# Allegro board LAY-46368_A1.brd
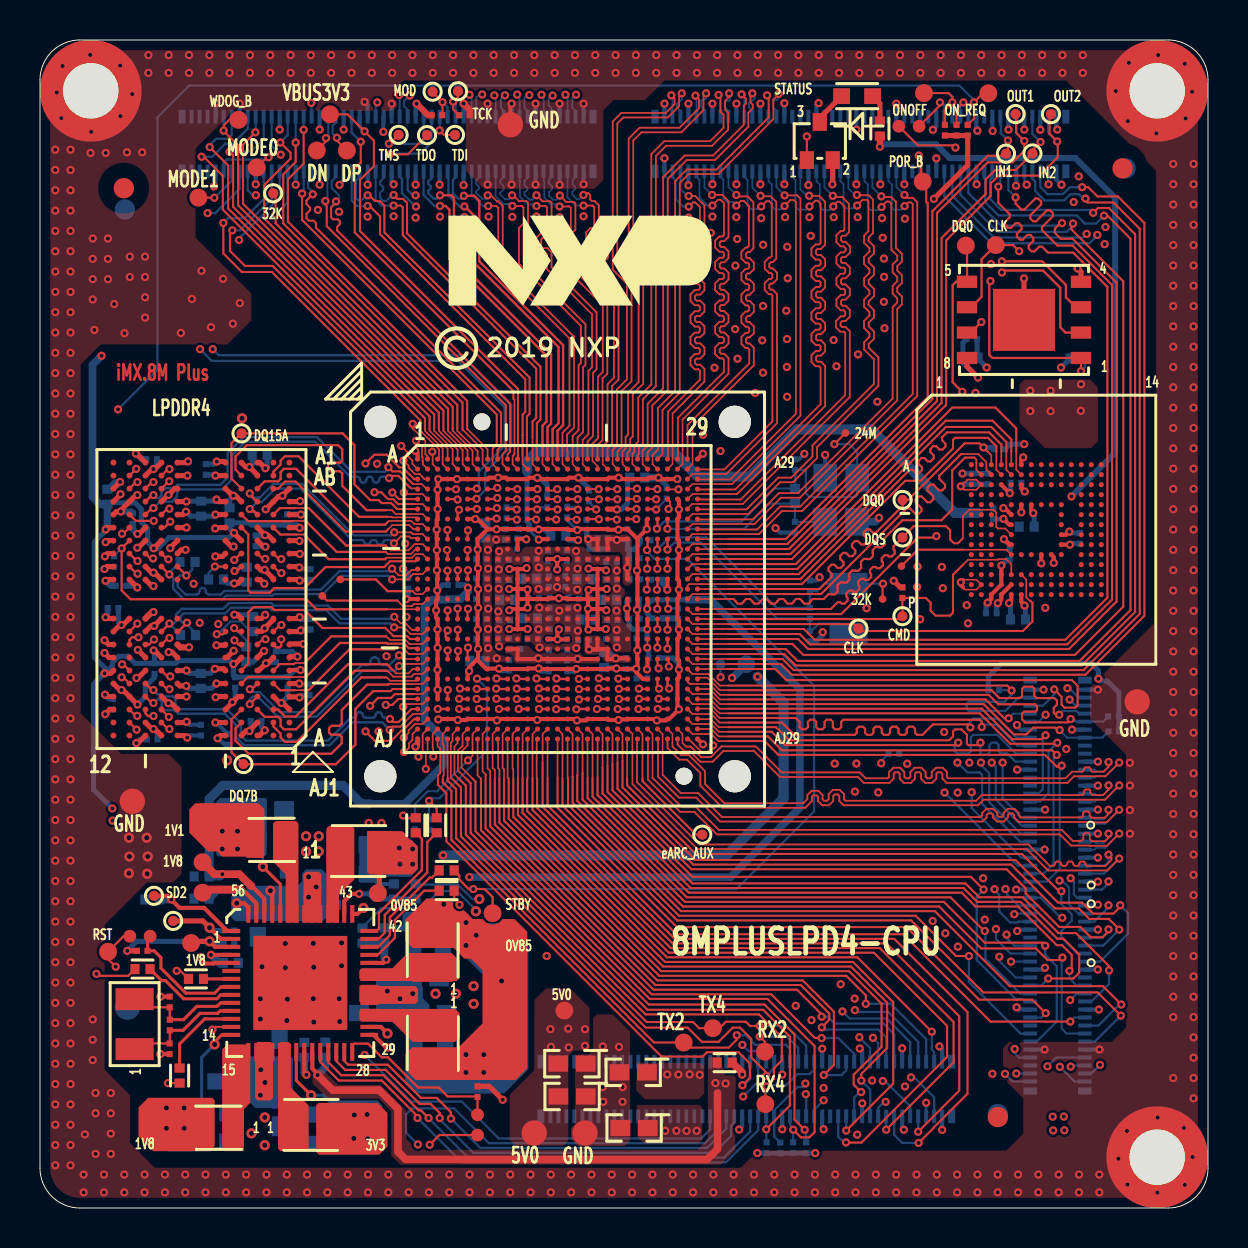
[diagram p0: board, top side]
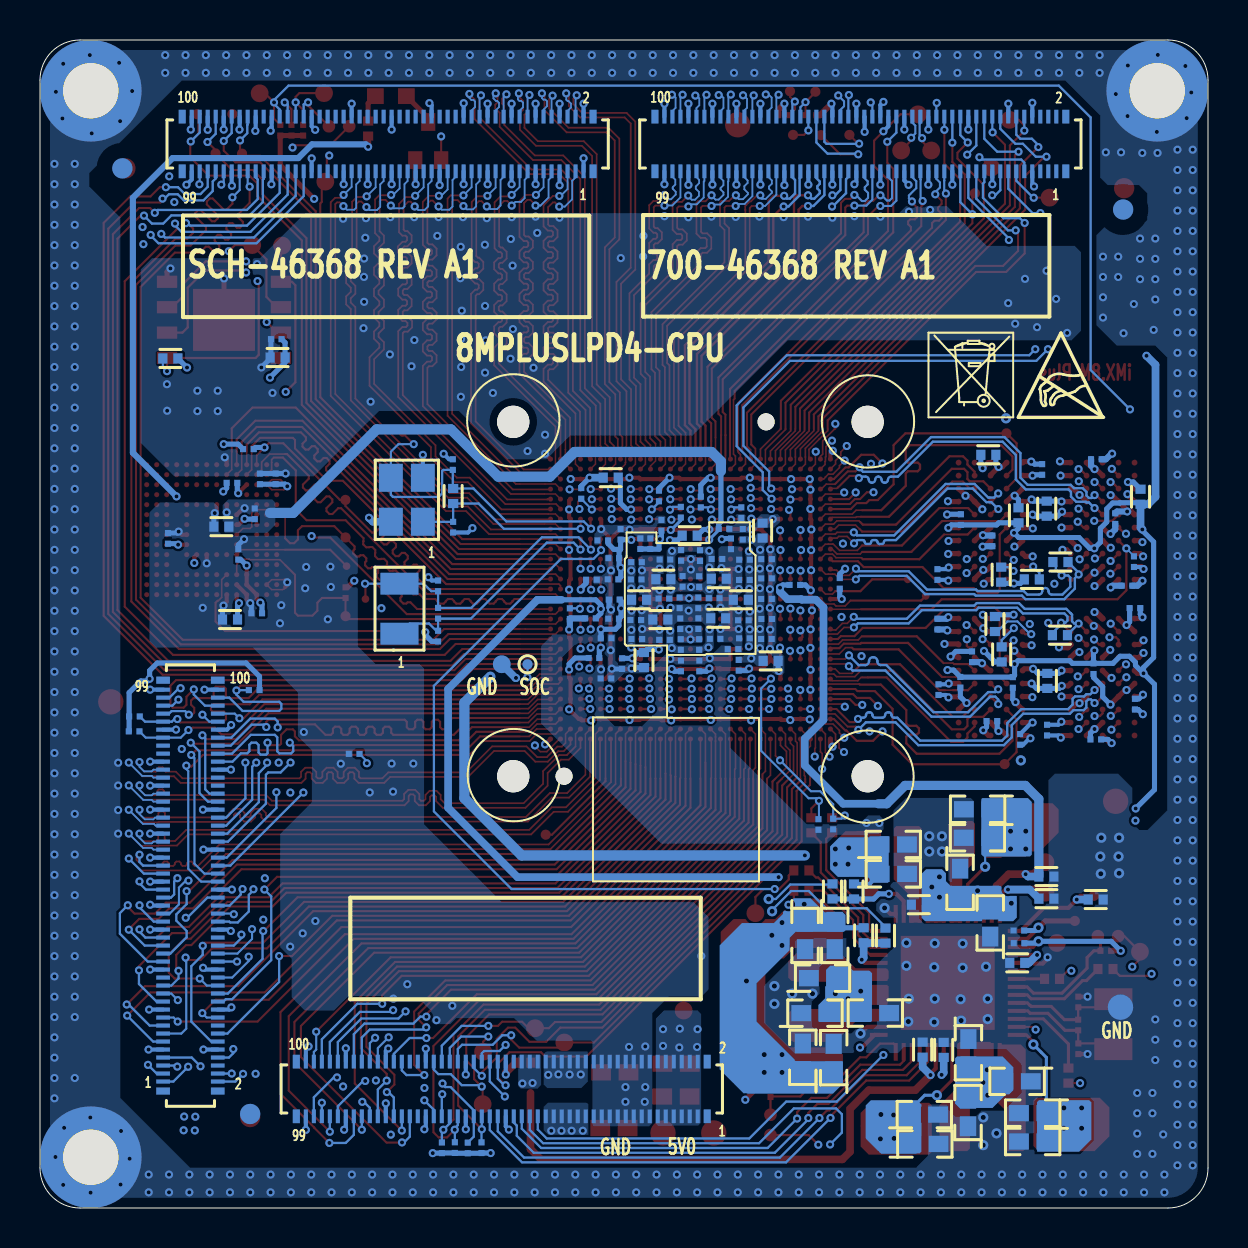
[diagram p1: board, bottom side, seen from below]

Outline 58.42 x 58.42 mm; copper layers: TOP, L2_GND_1, L3_IN1, L4_PWR, L5_GND_2, BOTTOM. Coordinates in mm from the lower left corner of the outline.
Outline path: 0,56.42 arc(0.59,57.83) 2,58.42 56.42,58.42 arc(57.83,57.83) 58.42,56.42 58.42,2 arc(57.83,0.59) 56.42,0 2,0 arc(0.59,0.59) 0,2 0,56.42

## Design rules (mm)
constraint set DEFAULT: min track width 0.104
net group DIFFPAIR23: nets USB1_TXN USB1_TXP
net group DIFFPAIR24: nets USB1_RXN USB1_RXP
net group DIFFPAIR25: nets USB2_TXN USB2_TXP
net group DIFFPAIR26: nets USB2_RXN USB2_RXP
net group DIFFPAIR27: nets PCIE_RXN PCIE_RXP
net group DIFFPAIR28: nets PCIE_TXN PCIE_TXP
net group DIFFPAIR54: nets PCIE_CLKN PCIE_CLKP
net group DIFFPAIR55: nets USB2_DN USB2_DP
net group DIFFPAIR56: nets USB1_DN USB1_DP
net group DIFFPAIR65: nets EARC_N_HPD EARC_P_UTIL
net group M-DDRRESS-A: nets DRAM_CK_C_A DRAM_CK_T_A
net group MG3: nets DRAM_CA4_A DRAM_CA5_A
net group DDR-DATA1: nets DRAM_DATA9_A DRAM_DATA10_A DRAM_DATA11_A DRAM_DATA14_A DRAM_DATA15_A DRAM_DMI1_A DRAM_SDQS1_C_A DRAM_SDQS1_T_A
net group DDRB_DATA1: nets DRAM_DATA1_B DRAM_DATA2_B DRAM_DATA3_B DRAM_DATA4_B DRAM_DATA6_B DRAM_DATA7_B DRAM_DMI0_B DRAM_SDQS0_C_B DRAM_SDQS0_T_B
net group LVDS0: nets LVDS0_CLK_N LVDS0_CLK_P LVDS0_TX0_N LVDS0_TX0_P LVDS0_TX1_N LVDS0_TX1_P LVDS0_TX2_N LVDS0_TX2_P LVDS0_TX3_N LVDS0_TX3_P
net group LVDS1: nets LVDS1_CLK_N LVDS1_CLK_P LVDS1_TX0_N LVDS1_TX0_P LVDS1_TX1_N LVDS1_TX1_P LVDS1_TX2_N LVDS1_TX2_P LVDS1_TX3_N LVDS1_TX3_P
net group M-CS2: nets CSI2_CKN CSI2_CKP CSI2_DN0 CSI2_DN1 CSI2_DN2 CSI2_DN3 CSI2_DP0 CSI2_DP1 CSI2_DP2 CSI2_DP3
net group M-CSI1: nets CSI1_CKN CSI1_CKP CSI1_DN0 CSI1_DN1 CSI1_DN2 CSI1_DN3 CSI1_DP0 CSI1_DP1 CSI1_DP2 CSI1_DP3
net group M-DDRRESS-B: nets DRAM_CA0_B DRAM_CA1_B DRAM_CA2_B DRAM_CA3_B DRAM_CA4_B DRAM_CA5_B DRAM_CK_C_B DRAM_CK_T_B DRAM_CKE0_B DRAM_CKE1_B DRAM_NCS0_B DRAM_NCS1_B
net group M-DSI: nets DSI_CKN DSI_CKP DSI_DN0 DSI_DN1 DSI_DN2 DSI_DN3 DSI_DP0 DSI_DP1 DSI_DP2 DSI_DP3
net group M-ENET-RX: nets ENET_RD0 ENET_RD1 ENET_RD2 ENET_RD3 ENET_RX_CTL ENET_RXC
net group M-ENET-TX: nets ENET_TD0 ENET_TD1 ENET_TD2 ENET_TD3 ENET_TX_CTL ENET_TXC
net group M-HDMI: nets HDMI_TXCN HDMI_TXCP HDMI_TXN0 HDMI_TXN1 HDMI_TXN2 HDMI_TXP0 HDMI_TXP1 HDMI_TXP2
net group M-SD1: nets SD1_CLK SD1_CMD SD1_DATA0 SD1_DATA1 SD1_DATA2 SD1_DATA3 SD1_DATA4 SD1_DATA5 SD1_DATA6 SD1_DATA7
net group MG1: nets DRAM_CKE0_A DRAM_CKE1_A DRAM_NCS0_A DRAM_NCS1_A
net group MG2: nets DRAM_CA0_A DRAM_CA1_A DRAM_CA2_A DRAM_CA3_A

## Placement (name value [footprint] x y rotation side)
BH1  MOUNTING HOLE  [GNDPOINT256]  55.88 55.88 0 top
BH2  MOUNTING HOLE  [GNDPOINT256]  55.88 2.54 0 top
BH3  MOUNTING HOLE  [GNDPOINT256]  2.54 55.88 0 top
C1  10uF  [0402_CC]  25.92 33.63 180 bottom
C2  1uF  [0201_CC]  30.11 28.5 180 bottom
C3  1uF  [0201_CC]  29.73 29.48 0 bottom
C5  1uF  [0201_CC]  25.44 27.11 270 bottom
C6  1uF  [0201_CC]  29.69 30.43 0 bottom
C7  1uF  [0201_CC]  23.76 27.95 180 bottom
C8  1uF  [0201_CC]  26.36 27.11 270 bottom
C10  1uF  [0201_CC]  30.89 29.49 0 bottom
C11  0.22UF  [0201_CC]  30.84 31.42 180 bottom
C12  1uF  [0201_CC]  27.34 34.15 90 bottom
C13  10uF  [0402_CC]  27.39 29.43 0 bottom
C14  1uF  [0201_CC]  27.19 28.42 0 bottom
C15  1uF  [0201_CC]  24.65 28.47 180 bottom
C16  1uF  [0201_CC]  26.37 28.19 90 bottom
C17  1uF  [0201_CC]  25.45 28.19 90 bottom
C18  1uF  [0201_CC]  30.11 26.49 180 bottom
C19  0.22UF  [0201_CC]  30.71 27.51 0 bottom
C20  0.22UF  [0201_CC]  24.21 33.97 180 bottom
C21  10uF  [0402_CC]  24.5 29.5 180 bottom
C22  1uF  [0201_CC]  26.43 30.27 90 bottom
C23  1uF  [0201_CC]  25.49 29.23 270 bottom
C24  1uF  [0201_CC]  26.4 29.22 270 bottom
C25  1uF  [0201_CC]  25.5 30.27 90 bottom
C27  1uF  [0201_CC]  23.86 33.22 270 bottom
C28  10uF  [0402_CC]  24.47 31.47 180 bottom
C29  1uF  [0201_CC]  28.62 29.41 180 bottom
C31  1uF  [0201_CC]  28.6 31.44 180 bottom
C32  1uF  [0201_CC]  28.58 32.3 180 bottom
C33  10uF  [0402_CC]  28.46 30.42 180 bottom
C34  1uF  [0201_CC]  25.45 31.33 90 bottom
C35  1uF  [0201_CC]  28.57 28.46 180 bottom
C36  1uF  [0201_CC]  26.35 32.64 270 bottom
C38  10uF  [0402_CC]  28.21 27.41 270 bottom
C39  1uF  [0201_CC]  29.72 32.5 0 bottom
C40  1uF  [0201_CC]  29.76 31.44 0 bottom
C41  1uF  [0201_CC]  28.39 33.23 90 bottom
C42  1uF  [0201_CC]  30.27 33.39 0 bottom
C43  10uF  [0402_CC]  27.24 31.45 0 bottom
C44  1uF  [0201_CC]  24.7 30.5 180 bottom
C45  1uF  [0201_CC]  26.28 31.34 90 bottom
C47  1uF  [0201_CC]  25.41 32.63 270 bottom
C48  1uF  [0201_CC]  29.31 27.23 270 bottom
C49  1uF  [0201_CC]  29.38 33.7 90 bottom
C50  1uF  [0201_CC]  20.67 31.16 180 bottom
C51  1uF  [0201_CC]  27.89 33.23 90 bottom
C53  1uF  [0201_CC]  23.18 32.42 0 bottom
C55  1uF  [0201_CC]  23.24 29.4 0 bottom
C56  1uF  [0201_CC]  23.19 28.49 0 bottom
C57  10uF  [0402_CC]  23.37 30.42 0 bottom
C58  1uF  [0201_CC]  27.16 32.43 0 bottom
C59  1uF  [0201_CC]  23.19 31.41 0 bottom
C60  1uF  [0201_CC]  24.56 32.46 180 bottom
C61  1uF  [0201_CC]  27.22 30.48 0 bottom
C62  10uF  [0402_CC]  22.28 33.88 90 bottom
C63  1uF  [0201_CC]  22.08 31.49 180 bottom
C64  1uF  [0201_CC]  23.47 27.15 270 bottom
C65  1uF  [0201_CC]  22.08 32.45 180 bottom
C67  10uF  [0402_CC]  21.88 27.36 180 bottom
C68  1uF  [0201_CC]  23.27 33.7 90 bottom
C69  1uF  [0201_CC]  22.09 28.46 180 bottom
C70  1uF  [0201_CC]  22.07 29.46 180 bottom
C71  1uF  [0201_CC]  22.08 30.46 180 bottom
C72  4.7uF  [0402_CC]  29.87 36.53 0 bottom
C80  10uF  [0402_CC]  3.37 35.58 90 bottom
C81  10uF  [0402_CC]  9.48 34.65 90 bottom
C83  1uF  [0201_CC]  12.36 34.43 90 bottom
C84  1uF  [0201_CC]  5.73 26.98 270 bottom
C85  1uF  [0201_CC]  9.76 26.29 270 bottom
C86  1uF  [0201_CC]  12.39 26.3 270 bottom
C87  10uF  [0402_CC]  8.04 26.36 270 bottom
C88  10uF  [0402_CC]  10.99 37.67 0 bottom
C89  1uF  [0201_CC]  13.53 29.2 270 bottom
C90  1uF  [0201_CC]  10.79 33.37 270 bottom
C91  1uF  [0201_CC]  10.81 24.35 0 bottom
C92  1uF  [0201_CC]  5.61 23.44 180 bottom
C93  1uF  [0201_CC]  3.65 30.01 0 bottom
C94  1uF  [0201_CC]  8.3 36.94 90 bottom
C95  1uF  [0201_CC]  5.58 37.45 180 bottom
C96  10uF  [0402_CC]  8.07 34.98 270 bottom
C97  1uF  [0201_CC]  4.64 34.48 90 bottom
C98  1uF  [0201_CC]  11.8 27.57 90 bottom
C99  1uF  [0201_CC]  4.05 31.13 0 bottom
C100  1uF  [0201_CC]  13.48 25.93 90 bottom
C101  1uF  [0201_CC]  13.53 31.69 90 bottom
C104  1uF  [0201_CC]  3.65 25.2 270 bottom
C105  18pF  [0201_CC]  31.92 29.73 270 bottom
C106  2200PF  [0201_CC]  31.35 35.74 90 bottom
C107  2200PF  [0201_CC]  27.46 35.61 90 bottom
C108  12pF  [0201_CC]  37.77 37.18 90 bottom
C109  12pF  [0201_CC]  37.76 34.05 270 bottom
C110  4.7uF  [0402_CC]  49.35 34.08 0 bottom
C111  0.22UF  [0201_CC]  47.68 34.72 270 bottom
C112  0.22UF  [0201_CC]  52.02 33.49 90 bottom
C113  10uF  [0402_CC]  48.92 29.43 0 bottom
C114  0.22UF  [0201_CC]  48.82 36.27 180 bottom
C115  0.22UF  [0201_CC]  48.5 32.7 90 bottom
C116  0.22UF  [0201_CC]  47.58 29.75 0 bottom
C117  0.22UF  [0201_CC]  47.42 36.47 90 bottom
C118  1uF  [0201_CC]  46.63 36.47 90 bottom
C119  10uF  [0402_CC]  46.54 42.54 0 bottom
C120  0.22UF  [0201_CC]  46.6 43.46 0 bottom
C125  10uF  [CC0603]  12.4 16.29 270 bottom
C126  22uF  [CC0603]  15.74 18.18 180 bottom
C127  22uF  [CC0603]  15.74 16.71 180 bottom
C129  10uF  [CC0603]  19.66 9.74 180 bottom
C130  22uF  [CC0603]  20.27 7.54 90 bottom
C131  22uF  [CC0603]  18.72 7.52 90 bottom
C132  1uF  [0201_CC]  9.45 13.25 0 bottom
C133  10uF  [CC0603]  10.89 14.26 90 bottom
C135  10uF  [CC0603]  19.28 11.5 180 bottom
C136  22uF  [CC0603]  18.67 13.63 270 bottom
C137  22uF  [CC0603]  20.15 13.63 270 bottom
C138  1uF  [0201_CC]  9.46 13.88 0 bottom
C139  10uF  [0402_CC]  8.08 16.58 180 bottom
C140  10uF  [CC0603]  9.55 6.34 0 bottom
C141  22uF  [CC0603]  14.19 4.67 180 bottom
C142  22uF  [CC0603]  14.16 3.2 180 bottom
C143  10uF  [CC0603]  12 4.78 90 bottom
C144  4.7uF  [0402_CC]  5.62 15.43 180 bottom
C145  10uF  [CC0603]  16.64 9.75 0 bottom
C146  22uF  [CC0603]  8.77 3.33 0 bottom
C147  22uF  [CC0603]  8.77 4.74 0 bottom
C148  4.7uF  [0402_CC]  8.08 15.47 180 bottom
C149  10uF  [CC0603]  11.98 7.77 270 bottom
C150  22uF  [CC0603]  11.52 19.94 0 bottom
C151  22uF  [CC0603]  11.53 18.52 0 bottom
C152  1.0UF  [0402_CC]  13.22 7.91 270 bottom
C153  4.7uF  [0402_CC]  14.27 7.92 270 bottom
C154  1.0UF  [0402_CC]  14.46 15.17 0 bottom
C155  1.0UF  [0402_CC]  9.54 12.26 0 bottom
C156  18pF  [0201_CC]  6.49 10.31 90 top
C157  18pF  [0201_CC]  6.48 7.97 270 top
C158  10uF  [CC0603]  26.61 5.58 180 top
C159  10uF  [CC0603]  26.61 7.22 180 top
C160  22uF  [CC0603]  29.67 6.79 180 top
C161  22uF  [CC0603]  29.71 4 180 top
C164  18pF  [0201_CC]  38.51 31.12 90 bottom
C165  18pF  [0201_CC]  38.51 28.6 270 bottom
C166  4.7uF  [0402_CC]  34.24 7.27 180 top
D1  LED GREEN  [LED_0603]  40.87 55.61 180 top
J3  DF40C-100DP-0.4V(51)  [CON100_0P4_21P7X2P05_SM]  17.39 53.22 180 bottom
J4  DF40C-100DP-0.4V(51)  [CON100_0P4_21P7X2P05_SM]  41.03 53.22 180 bottom
J5  DF40C-100DP-0.4V(51)  [CON100_0P4_21P7X2P05_SM]  35.32 5.95 180 bottom
J6  DF40C-100DP-0.4V(51)  [CON100_0P4_21P7X2P05_SM]  50.9 16.13 270 bottom
L4  0.47uH  [IND_SPH2520]  15.96 17.86 0 top
L5  0.47uH  [IND_SPH2520]  19.64 12.93 90 top
L6  0.47uH  [IND_SPH2520]  19.65 8.21 270 top
L7  0.47uH  [IND_SPH2520]  13.59 4.16 0 top
L8  0.47uH  [IND_2016A]  8.93 4.02 180 top
L9  0.47uH  [IND_2016A]  11.59 18.41 180 top
NOREF  -  []  9.52 7.76 0 top
NOREF#2  -  []  17.02 39.32 0 top
NOREF#3  -  []  -289.93 -208.54 0 top
NOREF#4  -  []  3.02 23.16 90 top
NOREF#5  -  []  67.9 4.93 90 top
NOREF#6  -  []  15.71 40.63 0 top
NOREF#7  -  []  51.89 52.19 0 top
NOREF#8  -  []  33.39 22.96 90 top
NOREF#9  -  []  3.67 23.63 90 top
NOREF#10  -  []  16.47 13.46 90 top
NOREF#11  -  []  -22.54 -40.96 0 top
NOREF#12  -  []  46.18 4.93 0 top
NOREF#13  -  []  -35.95 -144.77 0 top
NOREF#14  -  []  20.83 42.98 0 top
NOREF#15  -  []  25.05 4.59 0 top
NOREF#16  -  []  11.67 37.28 0 top
NOREF#17  -  []  25.52 4.59 0 top
NOREF#18  -  []  -0.02 0.23 0 top
NOREF#19  -  []  51.31 51.85 90 top
NOREF#20  -  []  3.67 23.63 90 top
NOREF#21  -  []  9.57 8.66 0 top
NOREF#22  -  []  28.15 29.04 0 top
NOREF#23  -  []  -262.65 318.84 0 top
NOREF#24  -  []  45.6 4.59 90 top
NOREF#25  -  []  32.89 25.96 90 top
NOREF#26  -  [unnamed#2]  54.15 52 0 top
NOREF#27  -  []  16.39 51.85 0 top
NOREF#28  -  []  18.89 23.46 0 top
NOREF#29  -  [unnamed#2]  47.91 4.55 0 top
NOREF#30  -  []  3.02 37.76 0 top
NOREF#31  -  []  18.39 22.96 0 top
NOREF#32  -  []  34.75 21.6 90 top
NOREF#33  -  []  10.42 7.81 0 top
NOREF#34  -  []  27.66 51.85 90 top
NOREF#35  -  []  6.53 52.19 0 top
NOREF#36  -  []  36.06 20.28 90 top
NOREF#37  -  []  17.02 21.6 0 top
NOREF#38  -  []  52.26 6.33 90 top
NOREF#39  -  []  52.26 15.13 90 top
NOREF#40  -  []  282.78 67.68 0 top
NOREF#41  -  []  20.45 45.14 0 top
NOREF#42  -  []  34.32 4.59 0 top
NOREF#43  -  []  7.59 51.85 0 top
NOREF#44  -  []  25.89 30.46 0 top
NOREF#45  -  []  25.88 30.46 0 top
NOREF#46  -  []  42.37 11.79 0 top
NOREF#47  -  [unnamed#2]  4.19 51.01 0 top
NOREF#48  -  []  73.61 52.19 90 top
NOREF#49  -  []  16.47 8.66 90 top
NOREF#50  -  []  -63.51 -55.87 0 top
NOREF#51  -  []  3.67 37.28 0 top
NOREF#52  -  []  6.53 52.19 90 top
NOREF#53  -  []  32.89 23.46 90 top
NOREF#54  -  []  7.11 51.85 0 top
NOREF#55  -  []  49.53 26.4 0 top
NOREF#56  -  []  29.95 9.68 0 top
NOREF#57  -  [unnamed#3]  25.89 30.46 0 top
NOREF#58  -  []  31.23 51.85 0 top
NOREF#59  -  []  22.39 26.96 0 top
NOREF#60  -  []  34.92 41.94 0 top
NOREF#61  -  []  40.03 51.85 0 top
NOREF#62  -  []  16.52 7.76 90 top
NOREF#63  -  []  29.39 26.96 90 top
NOREF#64  -  []  644.7 -150.45 0 top
NOREF#65  -  []  28.15 26.99 90 top
NOREF#66  -  []  52.26 5.85 90 top
NOREF#67  -  []  21.39 23.46 0 top
NOREF#68  -  []  15.62 7.81 90 top
NOREF#69  -  []  10.42 7.81 0 top
NOREF#70  -  []  32.21 21.6 0 top
NOREF#71  -  []  30.76 51.85 0 top
NOREF#72  -  [unnamed#2]  47.91 4.7 180 bottom
NOREF#73  -  [unnamed#2]  54.3 52 180 bottom
NOREF#74  -  [unnamed#2]  4.25 49.94 180 bottom
Q1  NX3008NBKW,115  [SC70_3]  39 53.37 0 top
QZ1  32.768KHZ  [XTAL2-3P2X1P5-SM]  4.73 9.2 90 top
QZ2  32.768KHZ  [XTAL2-3P2X1P5-SM]  40.44 29.98 90 bottom
R1  10K  [0402_CC]  10.32 27.69 90 bottom
R2  10K  [0402_CC]  10.66 29.21 270 bottom
R3  10K  [0402_CC]  10.34 31.68 90 bottom
R4  10K  [0402_CC]  8.81 31.44 180 bottom
R5  10K  [0201_CC]  3.71 32.33 90 bottom
R6  240 OHM  [0201_CC]  18.42 31.24 270 bottom
R7  240 OHM  [0201_CC]  9.4 23.44 270 bottom
R8  240 OHM  [0201_CC]  8.05 23.9 270 bottom
R9  150  [0402_CC]  7.38 32.31 180 bottom
R10  150  [0402_CC]  7.41 28.65 180 bottom
R11  0  [RC0402_25]  43.46 54.11 0 top
R12  1K  [0402_CC]  42.01 53.99 90 top
R13  4.7K  [0201_CC]  19.49 19.18 90 bottom
R14  4.7K  [0201_CC]  18.75 19.21 90 bottom
R15  4.7K  [0201_CC]  36.34 3.02 90 bottom
R16  4.7K  [0201_CC]  37.02 3 90 bottom
R17  4.7K  [0201_CC]  37.67 3.02 90 bottom
R18  4.7K  [0201_CC]  38.32 3.01 90 bottom
R21  10K  [0201_CC]  53.7 24.59 180 bottom
R22  10K  [0201_CC]  47.71 25.9 0 bottom
R23  4.7K  [0201_CC]  53.71 23.84 180 bottom
R24  8.2K  [0201_CC]  26.37 34.8 270 bottom
R25  200  [0201_CC]  23.34 34.78 270 bottom
R26  200  [0201_CC]  25.37 35.31 90 bottom
R27  8.2K  [0201_CC]  42.71 22.71 0 bottom
R28  100K  [0201_CC]  46.4 53.91 90 top
R29  100K  [0201_CC]  45.84 53.91 90 top
R30  100K  [0201_CC]  45.26 53.91 90 top
R31  10K  [0201_CC]  21.23 54.66 0 top
R32  10K  [0201_CC]  19.86 54.66 180 top
R35  510K  [0402_CC]  37.76 35.61 270 bottom
R36  10K  [0201_CC]  48 37.96 180 bottom
R37  10K  [0201_CC]  43.14 30.78 270 top
R38  10K  [0402_CC]  51.9 42.49 0 bottom
R50  0  [0402_CC]  18.78 15.84 270 bottom
R51  0  [0402_CC]  17.71 15.83 90 bottom
R52  0  [0402_CC]  16.13 13.63 270 bottom
R53  0  [0402_CC]  17.22 13.64 90 bottom
R54  0  [0402_CC]  6.98 6.62 90 top
R55  100K  [0201_CC]  5.11 12.86 0 top
R56  0  [RC0402_25]  5 13.6 0 top
R57  0  [0402_CC]  20.34 15.87 180 top
R58  0  [0402_CC]  20.34 16.89 180 top
R60  0  [RC0402_25]  21.88 4.16 90 top
R61  100K  [0201_CC]  21.88 5.82 270 top
R62  0  [0402_CC]  19.84 19.14 270 top
R63  0  [0402_CC]  5.13 11.95 180 top
R64  0  [0402_CC]  18.8 19.14 270 top
R65  1M  [0201_CC]  6.49 9.15 270 top
R74  1M  [0201_CC]  38.51 29.75 270 bottom
R75  0  [0402_CC]  7.8 11.46 180 top
TP1  -  [TPAD_015]  14.12 30.61 0 top
TP2  -  [TPAD_015]  15.02 31.44 0 top
TP3  -  [TPAD_020]  20.76 53.67 0 top
TP4  -  [TPAD_020]  17.94 53.67 0 top
TP5  -  [TPAD_020]  20.91 55.86 0 top
TP6  -  [TPAD_020]  19.36 53.66 0 top
TP7  TP_35MIL  [TESTPOINT_35MIL]  44.21 55.76 180 top
TP8  TP_35MIL  [TESTPOINT_35MIL]  44.15 51.34 180 top
TP9  TP_35MIL  [TESTPOINT_35MIL]  47.43 55.75 180 top
TP10  TP_35MIL  [TESTPOINT_35MIL]  22.64 14.75 0 top
TP11  -  [TPAD_015]  42.14 30.46 270 top
TP12  -  [TPAD_015]  40.29 38.76 90 top
TP13  -  [TPAD_020]  48.31 52.73 0 top
TP14  -  [TPAD_020]  49.64 52.75 0 top
TP15  -  [TPAD_020]  43.14 35.42 0 top
TP16  -  [TPAD_020]  43.14 33.54 270 top
TP17  -  [TPAD_020]  43.14 29.6 270 top
TP18  -  [TPAD_020]  40.94 28.98 270 top
TP19  -  [TPAD_015]  43.09 32.1 270 top
TP20  TP_35MIL  [TESTPOINT_35MIL]  46.31 48.14 180 top
TP21  TP_35MIL  [TESTPOINT_35MIL]  47.81 48.16 180 top
TP22  -  [TPAD_020]  19.64 55.83 90 top
TP23  -  [TPAD_020]  10.17 22.2 0 top
TP24  -  [TPAD_020]  10.08 38.74 0 top
TP25  TP_35MIL  [TESTPOINT_35MIL]  16.9 15.75 0 top
TP26  -  [TPAD_020]  11.66 50.75 0 top
TP27  TP_35MIL  [TESTPOINT_35MIL]  22.64 12.91 270 top
TP28  TP_35MIL  [TESTPOINT_35MIL]  7.56 13.25 0 top
TP29  -  [TPAD_020]  6.66 14.36 0 top
TP30  TP_35MIL  [TESTPOINT_35MIL]  8.13 17.3 0 top
TP31  TP_35MIL  [TESTPOINT_35MIL]  16.92 4.09 0 top
TP32  -  [TPAD_020]  5.7 15.61 0 top
TP33  TP_35MIL  [TESTPOINT_35MIL]  5.53 4.09 0 top
TP34  TP_35MIL  [TESTPOINT_35MIL]  8.13 15.77 0 top
TP35  TP_35MIL  [TESTPOINT_35MIL]  8.13 18.82 0 top
TP36  -  [TPAD_050]  4.38 10.05 180 bottom
TP37  -  [TPAD_050]  4.62 20.34 0 top
TP38  -  [TPAD_050]  54.88 25.32 0 top
TP39  -  [TPAD_050]  23.52 54.18 0 top
TP40  TP_35MIL  [TESTPOINT_35MIL]  3.41 12.82 0 top
TP41  TP_35MIL  [TESTPOINT_35MIL]  9.93 54.43 0 top
TP43  TP_35MIL  [TESTPOINT_35MIL]  26.23 9.88 0 top
TP44  -  [TPAD_020]  33.13 18.67 0 top
TP45  -  [TPAD_020]  50.57 54.71 90 top
TP46  -  [TPAD_020]  48.8 54.72 90 top
TP47  -  [TPAD_050]  24.72 3.75 0 top
TP48  -  [TPAD_050]  27.26 3.75 0 top
TP49  -  [TPAD_020]  34.04 27.19 180 bottom
TP50  TP_35MIL  [TESTPOINT_35MIL]  35.32 27.2 180 bottom
TP51  TP_35MIL  [TESTPOINT_35MIL]  10.84 52.04 0 top
TP52  TP_35MIL  [TESTPOINT_35MIL]  7.93 50.53 0 top
TP53  TP_35MIL  [TESTPOINT_35MIL]  32.2 8.28 0 top
TP54  TP_35MIL  [TESTPOINT_35MIL]  36.26 7.82 0 top
TP55  TP_35MIL  [TESTPOINT_35MIL]  33.66 8.99 0 top
TP56  TP_35MIL  [TESTPOINT_35MIL]  36.28 5.2 0 top
TP57  TP_35MIL  [TESTPOINT_35MIL]  14.5 54.7 0 top
TP58  TP_35MIL  [TESTPOINT_35MIL]  13.85 52.89 0 top
TP59  TP_35MIL  [TESTPOINT_35MIL]  15.35 52.89 0 top
U1  MIMX8MP8DVNLZAA  [BGA548_0P5_15X15MM]  25.89 30.46 0 top
U2  MT53E1536M32D4DT-046 WT:A  [BGA200_0P65X0P8_10P1X14P6]  8.07 30.46 180 top
U3  SDINBDG4-16G-I  [FBGA153_0P5_11P5X13]  49.83 33.93 0 top
U4  MT25QU256ABA1EW7-0SIT  [DFN8_1P27_6X5MM_3P1]  49.22 44.42 180 top
U6  PCA9450CHN  [HVQFN56_0P4_7X7_EP4P7MM]  13.02 11.26 0 top
Y1  24MHZ  [XTLOSC4_3P2X2P5MM_SM]  40.07 35.42 90 bottom

## Library data of the parts
BH1-BH3 = MOUNT_HOLE
C1-C3 C5-C8 C10-C25 C27-C29 C31-C36 C38-C45 C47-C51 C53 C55-C65 C67-C72 C80 C81 C83-C101 C104-C120 C125-C127 C129-C133 C135-C161 C164-C166 = CAP_NP
D1 = LED
J3-J6 = HDR_2X50_M
L4-L7 = INDUCTOR: tolerance: 20%
L8 L9 = INDUCTOR
Q1 = NMOS_NX3008NBK
QZ1 QZ2 = XTAL
R1-R11 R13-R18 R21-R32 R35-R38 R50-R58 R60-R65 R74 R75 = RES
R12 = RES: tolerance: 5%
TP1 TP2 TP11 TP12 TP19 = TestLoop
TP3-TP6 TP13-TP18 TP22-TP24 TP26 TP29 TP32 TP36-TP39 TP44-TP49 = TESTLOOP
TP7-TP10 TP20 TP21 TP25 TP27 TP28 TP30 TP31 TP33-TP35 TP40 TP41 TP43 TP50-TP59 = T POINT R: Tolerance: TOLERANCE; User Part Number: 510-75618
U1 = MIMX8MP_BGA548
U2 = MT53B768M32D4NQ_200P
U3 = SDINBDG4-16G_VFBGA_153P
U4 = MT25QL256ABA1EW9_9P
U6 = PCA9450_HVQFN56P_A
Y1 = XTAL_13Y

## Footprints (pads in the part's own frame, mm; a bottom-side part is the same pattern mirrored in y, then rotated)
0201_CC
  rect 0.305x0.305 smd: 1(-0.267,0) 2(0.267,0)
0402_CC
  rect 0.457x0.508 smd: 1(-0.376,0) 2(0.376,0)
BGA200_0P65X0P8_10P1X14P6
  round 0.292 smd: A1(-4.4,6.825) A2(-3.6,6.825) A3(-2.8,6.825) A4(-2,6.825) A5(-1.2,6.825) A8(1.2,6.825) A9(2,6.825) A10(2.8,6.825) A11(3.6,6.825) A12(4.4,6.825) AA1(-4.4,-6.175) AA2(-3.6,-6.175) AA3(-2.8,-6.175) AA4(-2,-6.175) AA5(-1.2,-6.175) AA8(1.2,-6.175) AA9(2,-6.175) AA10(2.8,-6.175) AA11(3.6,-6.175) AA12(4.4,-6.175) AB1(-4.4,-6.825) AB2(-3.6,-6.825) AB3(-2.8,-6.825) AB4(-2,-6.825) AB5(-1.2,-6.825) AB8(1.2,-6.825) AB9(2,-6.825) AB10(2.8,-6.825) AB11(3.6,-6.825) AB12(4.4,-6.825) B1(-4.4,6.175) B2(-3.6,6.175) B3(-2.8,6.175) B4(-2,6.175) B5(-1.2,6.175) B8(1.2,6.175) B9(2,6.175) B10(2.8,6.175) B11(3.6,6.175) B12(4.4,6.175) C1(-4.4,5.525) C2(-3.6,5.525) C3(-2.8,5.525) C4(-2,5.525) C5(-1.2,5.525) C8(1.2,5.525) C9(2,5.525) C10(2.8,5.525) C11(3.6,5.525) C12(4.4,5.525) D1(-4.4,4.875) D2(-3.6,4.875) D3(-2.8,4.875) D4(-2,4.875) D5(-1.2,4.875) D8(1.2,4.875) D9(2,4.875) D10(2.8,4.875) D11(3.6,4.875) D12(4.4,4.875) E1(-4.4,4.225) E2(-3.6,4.225) E3(-2.8,4.225) E4(-2,4.225) E5(-1.2,4.225) E8(1.2,4.225) E9(2,4.225) E10(2.8,4.225) E11(3.6,4.225) E12(4.4,4.225) F1(-4.4,3.575) F2(-3.6,3.575) F3(-2.8,3.575) F4(-2,3.575) F5(-1.2,3.575) F8(1.2,3.575) F9(2,3.575) F10(2.8,3.575) F11(3.6,3.575) F12(4.4,3.575) G1(-4.4,2.925) G2(-3.6,2.925) G3(-2.8,2.925) G4(-2,2.925) G5(-1.2,2.925) G8(1.2,2.925) G9(2,2.925) G10(2.8,2.925) G11(3.6,2.925) G12(4.4,2.925) H1(-4.4,2.275) H2(-3.6,2.275) H3(-2.8,2.275) H4(-2,2.275) H5(-1.2,2.275) H8(1.2,2.275) H9(2,2.275) H10(2.8,2.275) H11(3.6,2.275) H12(4.4,2.275) J1(-4.4,1.625) J2(-3.6,1.625) J3(-2.8,1.625) J4(-2,1.625) J5(-1.2,1.625) J8(1.2,1.625) J9(2,1.625) J10(2.8,1.625) J11(3.6,1.625) J12(4.4,1.625) K1(-4.4,0.975) K2(-3.6,0.975) K3(-2.8,0.975) K4(-2,0.975) K5(-1.2,0.975) K8(1.2,0.975) K9(2,0.975) K10(2.8,0.975) K11(3.6,0.975) K12(4.4,0.975) N1(-4.4,-0.975) N2(-3.6,-0.975) N3(-2.8,-0.975) N4(-2,-0.975) N5(-1.2,-0.975) N8(1.2,-0.975) N9(2,-0.975) N10(2.8,-0.975) N11(3.6,-0.975) N12(4.4,-0.975) P1(-4.4,-1.625) P2(-3.6,-1.625) P3(-2.8,-1.625) P4(-2,-1.625) P5(-1.2,-1.625) P8(1.2,-1.625) P9(2,-1.625) P10(2.8,-1.625) P11(3.6,-1.625) P12(4.4,-1.625) R1(-4.4,-2.275) R2(-3.6,-2.275) R3(-2.8,-2.275) R4(-2,-2.275) R5(-1.2,-2.275) R8(1.2,-2.275) R9(2,-2.275) R10(2.8,-2.275) R11(3.6,-2.275) R12(4.4,-2.275) T1(-4.4,-2.925) T2(-3.6,-2.925) T3(-2.8,-2.925) T4(-2,-2.925) T5(-1.2,-2.925) T8(1.2,-2.925) T9(2,-2.925) T10(2.8,-2.925) T11(3.6,-2.925) T12(4.4,-2.925) U1(-4.4,-3.575) U2(-3.6,-3.575) U3(-2.8,-3.575) U4(-2,-3.575) U5(-1.2,-3.575) U8(1.2,-3.575) U9(2,-3.575) U10(2.8,-3.575) U11(3.6,-3.575) U12(4.4,-3.575) V1(-4.4,-4.225) V2(-3.6,-4.225) V3(-2.8,-4.225) V4(-2,-4.225) V5(-1.2,-4.225) V8(1.2,-4.225) V9(2,-4.225) V10(2.8,-4.225) V11(3.6,-4.225) V12(4.4,-4.225) W1(-4.4,-4.875) W2(-3.6,-4.875) W3(-2.8,-4.875) W4(-2,-4.875) W5(-1.2,-4.875) W8(1.2,-4.875) W9(2,-4.875) W10(2.8,-4.875) W11(3.6,-4.875) W12(4.4,-4.875) Y1(-4.4,-5.525) Y2(-3.6,-5.525) Y3(-2.8,-5.525) Y4(-2,-5.525) Y5(-1.2,-5.525) Y8(1.2,-5.525) Y9(2,-5.525) Y10(2.8,-5.525) Y11(3.6,-5.525) Y12(4.4,-5.525)
BGA548_0P5_15X15MM
  round 0.254 smd: A1(-7,7) A2(-6.5,7) A3(-6,7) A4(-5.5,7) A5(-5,7) A6(-4.5,7) A7(-4,7) A8(-3.5,7) A9(-3,7) A10(-2.5,7) A11(-2,7) A12(-1.5,7) A13(-1,7) A14(-0.5,7) A15(0,7) A16(0.5,7) A17(1,7) A18(1.5,7) A19(2,7) A20(2.5,7) A21(3,7) A22(3.5,7) A23(4,7) A24(4.5,7) A25(5,7) A26(5.5,7) A27(6,7) A28(6.5,7) A29(7,7) AA1(-7,-3) AA2(-6.5,-3) AA3(-6,-3) AA4(-5.5,-3) AA5(-5,-3) AA6(-4.5,-3) AA7(-4,-3) AA8(-3.5,-3) AA10(-2.5,-3) AA11(-2,-3) AA14(-0.5,-3) AA16(0.5,-3) AA19(2,-3) AA20(2.5,-3) AA22(3.5,-3) AA23(4,-3) AA24(4.5,-3) AA25(5,-3) AA26(5.5,-3) AA27(6,-3) AA28(6.5,-3) AA29(7,-3) AB1(-7,-3.5) AB2(-6.5,-3.5) AB8(-3.5,-3.5) AB10(-2.5,-3.5) AB12(-1.5,-3.5) AB14(-0.5,-3.5) AB16(0.5,-3.5) AB18(1.5,-3.5) AB20(2.5,-3.5) AB22(3.5,-3.5) AB28(6.5,-3.5) AB29(7,-3.5) AC1(-7,-4) AC2(-6.5,-4) AC3(-6,-4) AC4(-5.5,-4) AC5(-5,-4) AC6(-4.5,-4) AC8(-3.5,-4) AC10(-2.5,-4) AC12(-1.5,-4) AC14(-0.5,-4) AC16(0.5,-4) AC18(1.5,-4) AC20(2.5,-4) AC22(3.5,-4) AC24(4.5,-4) AC25(5,-4) AC26(5.5,-4) AC27(6,-4) AC28(6.5,-4) AC29(7,-4) AD1(-7,-4.5) AD2(-6.5,-4.5) AD6(-4.5,-4.5) AD8(-3.5,-4.5) AD10(-2.5,-4.5) AD12(-1.5,-4.5) AD14(-0.5,-4.5) AD16(0.5,-4.5) AD18(1.5,-4.5) AD20(2.5,-4.5) AD22(3.5,-4.5) AD24(4.5,-4.5) AD28(6.5,-4.5) AD29(7,-4.5) AE1(-7,-5) AE2(-6.5,-5) AE3(-6,-5) AE4(-5.5,-5) AE6(-4.5,-5) AE8(-3.5,-5) AE10(-2.5,-5) AE12(-1.5,-5) AE14(-0.5,-5) AE16(0.5,-5) AE18(1.5,-5) AE20(2.5,-5) AE22(3.5,-5) AE24(4.5,-5) AE26(5.5,-5) AE27(6,-5) AE28(6.5,-5) AE29(7,-5) AF1(-7,-5.5) AF2(-6.5,-5.5) AF4(-5.5,-5.5) AF6(-4.5,-5.5) AF8(-3.5,-5.5) AF10(-2.5,-5.5) AF12(-1.5,-5.5) AF14(-0.5,-5.5) AF16(0.5,-5.5) AF18(1.5,-5.5) AF20(2.5,-5.5) AF22(3.5,-5.5) AF24(4.5,-5.5) AF26(5.5,-5.5) AF28(6.5,-5.5) AF29(7,-5.5) AG1(-7,-6) AG2(-6.5,-6) AG4(-5.5,-6) AG6(-4.5,-6) AG8(-3.5,-6) AG10(-2.5,-6) AG12(-1.5,-6) AG14(-0.5,-6) AG16(0.5,-6) AG18(1.5,-6) AG20(2.5,-6) AG22(3.5,-6) AG24(4.5,-6) AG26(5.5,-6) AG28(6.5,-6) AG29(7,-6) AH1(-7,-6.5) AH2(-6.5,-6.5) AH3(-6,-6.5) AH4(-5.5,-6.5) AH5(-5,-6.5) AH6(-4.5,-6.5) AH7(-4,-6.5) AH8(-3.5,-6.5) AH9(-3,-6.5) AH10(-2.5,-6.5) AH11(-2,-6.5) AH12(-1.5,-6.5) AH13(-1,-6.5) AH14(-0.5,-6.5) AH15(0,-6.5) AH16(0.5,-6.5) AH17(1,-6.5) AH18(1.5,-6.5) AH19(2,-6.5) AH20(2.5,-6.5) AH21(3,-6.5) AH22(3.5,-6.5) AH23(4,-6.5) AH24(4.5,-6.5) AH25(5,-6.5) AH26(5.5,-6.5) AH27(6,-6.5) AH28(6.5,-6.5) AH29(7,-6.5) AJ1(-7,-7) AJ2(-6.5,-7) AJ3(-6,-7) AJ4(-5.5,-7) AJ5(-5,-7) AJ6(-4.5,-7) AJ7(-4,-7) AJ8(-3.5,-7) AJ9(-3,-7) AJ10(-2.5,-7) AJ11(-2,-7) AJ12(-1.5,-7) AJ13(-1,-7) AJ14(-0.5,-7) AJ15(0,-7) AJ16(0.5,-7) AJ17(1,-7) AJ18(1.5,-7) AJ19(2,-7) AJ20(2.5,-7) AJ21(3,-7) AJ22(3.5,-7) AJ23(4,-7) AJ24(4.5,-7) AJ25(5,-7) AJ26(5.5,-7) AJ27(6,-7) AJ28(6.5,-7) AJ29(7,-7) B1(-7,6.5) B2(-6.5,6.5) B3(-6,6.5) B4(-5.5,6.5) B5(-5,6.5) B6(-4.5,6.5) B7(-4,6.5) B8(-3.5,6.5) B9(-3,6.5) B10(-2.5,6.5) B11(-2,6.5) B12(-1.5,6.5) B13(-1,6.5) B14(-0.5,6.5) B15(0,6.5) B16(0.5,6.5) B17(1,6.5) B18(1.5,6.5) B19(2,6.5) B20(2.5,6.5) B21(3,6.5) B22(3.5,6.5) B23(4,6.5) B24(4.5,6.5) B25(5,6.5) B26(5.5,6.5) B27(6,6.5) B28(6.5,6.5) B29(7,6.5) C1(-7,6) C2(-6.5,6) C4(-5.5,6) C6(-4.5,6) C8(-3.5,6) C10(-2.5,6) C12(-1.5,6) C14(-0.5,6) C16(0.5,6) C18(1.5,6) C20(2.5,6) C22(3.5,6) C24(4.5,6) C26(5.5,6) C28(6.5,6) C29(7,6) D1(-7,5.5) D2(-6.5,5.5) D4(-5.5,5.5) D6(-4.5,5.5) D8(-3.5,5.5) D10(-2.5,5.5) D12(-1.5,5.5) D14(-0.5,5.5) D16(0.5,5.5) D18(1.5,5.5) D20(2.5,5.5) D22(3.5,5.5) D24(4.5,5.5) D26(5.5,5.5) D28(6.5,5.5) D29(7,5.5) E1(-7,5) E2(-6.5,5) E3(-6,5) E4(-5.5,5) E6(-4.5,5) E8(-3.5,5) E10(-2.5,5) E12(-1.5,5) E14(-0.5,5) E16(0.5,5) E18(1.5,5) E20(2.5,5) E22(3.5,5) E24(4.5,5) E26(5.5,5) E27(6,5) E28(6.5,5) E29(7,5) F1(-7,4.5) F2(-6.5,4.5) F6(-4.5,4.5) F8(-3.5,4.5) F10(-2.5,4.5) F12(-1.5,4.5) F14(-0.5,4.5) F16(0.5,4.5) F18(1.5,4.5) F20(2.5,4.5) F22(3.5,4.5) F24(4.5,4.5) F28(6.5,4.5) F29(7,4.5) G1(-7,4) G2(-6.5,4) G3(-6,4) G4(-5.5,4) G5(-5,4) G6(-4.5,4) G8(-3.5,4) G10(-2.5,4) G12(-1.5,4) G14(-0.5,4) G16(0.5,4) G18(1.5,4) G20(2.5,4) G22(3.5,4) G24(4.5,4) G25(5,4) G26(5.5,4) G27(6,4) G28(6.5,4) G29(7,4) H1(-7,3.5) H2(-6.5,3.5) H8(-3.5,3.5) H10(-2.5,3.5) H12(-1.5,3.5) H14(-0.5,3.5) H16(0.5,3.5) H18(1.5,3.5) H20(2.5,3.5) H22(3.5,3.5) H28(6.5,3.5) H29(7,3.5) J1(-7,3) J2(-6.5,3) J3(-6,3) J4(-5.5,3) J5(-5,3) J6(-4.5,3) J7(-4,3) J8(-3.5,3) J10(-2.5,3) J11(-2,3) J14(-0.5,3) J16(0.5,3) J19(2,3) J20(2.5,3) J22(3.5,3) J23(4,3) J24(4.5,3) J25(5,3) J26(5.5,3) J27(6,3) J28(6.5,3) J29(7,3) K1(-7,2.5) K2(-6.5,2.5) K10(-2.5,2.5) K11(-2,2.5) K14(-0.5,2.5) K15(0,2.5) K16(0.5,2.5) K19(2,2.5) K20(2.5,2.5) K28(6.5,2.5) K29(7,2.5) L1(-7,2) L2(-6.5,2) L3(-6,2) L4(-5.5,2) L5(-5,2) L6(-4.5,2) L7(-4,2) L8(-3.5,2) L9(-3,2) L10(-2.5,2) L11(-2,2) L12(-1.5,2) L13(-1,2) L14(-0.5,2) L16(0.5,2) L17(1,2) L18(1.5,2) L19(2,2) L20(2.5,2) L21(3,2) L22(3.5,2) L23(4,2) L24(4.5,2) L25(5,2) L26(5.5,2) L27(6,2) L28(6.5,2) L29(7,2) M1(-7,1.5) M2(-6.5,1.5) M11(-2,1.5) M14(-0.5,1.5) M16(0.5,1.5) M19(2,1.5) M28(6.5,1.5) M29(7,1.5) N1(-7,1) N2(-6.5,1) N3(-6,1) N4(-5.5,1) N5(-5,1) N6(-4.5,1) N7(-4,1) N8(-3.5,1) N9(-3,1) N10(-2.5,1) N11(-2,1) N12(-1.5,1) N13(-1,1) N14(-0.5,1) N15(0,1) N16(0.5,1) N17(1,1) N18(1.5,1) N19(2,1) N20(2.5,1) N21(3,1) N22(3.5,1) N23(4,1) N24(4.5,1) N25(5,1) N26(5.5,1) N27(6,1) N28(6.5,1) N29(7,1) P1(-7,0.5) P2(-6.5,0.5) P11(-2,0.5) P14(-0.5,0.5) P16(0.5,0.5) P19(2,0.5) P28(6.5,0.5) P29(7,0.5) R1(-7,0) R2(-6.5,0) R3(-6,0) R4(-5.5,0) R5(-5,0) R6(-4.5,0) R7(-4,0) R8(-3.5,0) R9(-3,0) R10(-2.5,0) R11(-2,0) R12(-1.5,0) R13(-1,0) R14(-0.5,0) R16(0.5,0) R17(1,0) R18(1.5,0) R19(2,0) R20(2.5,0) R21(3,0) R22(3.5,0) R23(4,0) R24(4.5,0) R25(5,0) R26(5.5,0) R27(6,0) R28(6.5,0) R29(7,0) T1(-7,-0.5) T2(-6.5,-0.5) T11(-2,-0.5) T14(-0.5,-0.5) T16(0.5,-0.5) T19(2,-0.5) T28(6.5,-0.5) T29(7,-0.5) U1(-7,-1) U2(-6.5,-1) U3(-6,-1) U4(-5.5,-1) U5(-5,-1) U6(-4.5,-1) U7(-4,-1) U8(-3.5,-1) U9(-3,-1) U10(-2.5,-1) U11(-2,-1) U12(-1.5,-1) U13(-1,-1) U14(-0.5,-1) U15(0,-1) U16(0.5,-1) U17(1,-1) U18(1.5,-1) U19(2,-1) U20(2.5,-1) U21(3,-1) U22(3.5,-1) U23(4,-1) U24(4.5,-1) U25(5,-1) U26(5.5,-1) U27(6,-1) U28(6.5,-1) U29(7,-1) V1(-7,-1.5) V2(-6.5,-1.5) V11(-2,-1.5) V14(-0.5,-1.5) V16(0.5,-1.5) V19(2,-1.5) V28(6.5,-1.5) V29(7,-1.5) W1(-7,-2) W2(-6.5,-2) W3(-6,-2) W4(-5.5,-2) W5(-5,-2) W6(-4.5,-2) W7(-4,-2) W8(-3.5,-2) W9(-3,-2) W10(-2.5,-2) W11(-2,-2) W12(-1.5,-2) W13(-1,-2) W14(-0.5,-2) W16(0.5,-2) W17(1,-2) W18(1.5,-2) W19(2,-2) W20(2.5,-2) W21(3,-2) W22(3.5,-2) W23(4,-2) W24(4.5,-2) W25(5,-2) W26(5.5,-2) W27(6,-2) W28(6.5,-2) W29(7,-2) Y1(-7,-2.5) Y2(-6.5,-2.5) Y10(-2.5,-2.5) Y11(-2,-2.5) Y14(-0.5,-2.5) Y15(0,-2.5) Y16(0.5,-2.5) Y19(2,-2.5) Y20(2.5,-2.5) Y28(6.5,-2.5) Y29(7,-2.5)
CC0603
  rect 0.991x0.813 smd: 1(-0.686,0) 2(0.686,0)
CON100_0P4_21P7X2P05_SM
  rect 0.356x0.686 smd: (-10.275,-1.368) (-10.275,1.368) (10.275,-1.368) (10.275,1.368)
  rect 0.203x0.686 smd: 1(9.8,-1.368) 2(9.8,1.368) 3(9.4,-1.368) 4(9.4,1.368) 5(9,-1.368) 6(9,1.368) 7(8.6,-1.368) 8(8.6,1.368) 9(8.2,-1.368) 10(8.2,1.368) 11(7.8,-1.368) 12(7.8,1.368) 13(7.4,-1.368) 14(7.4,1.368) 15(7,-1.368) 16(7,1.368) 17(6.6,-1.368) 18(6.6,1.368) 19(6.2,-1.368) 20(6.2,1.368) 21(5.8,-1.368) 22(5.8,1.368) 23(5.4,-1.368) 24(5.4,1.368) 25(5,-1.368) 26(5,1.368) 27(4.6,-1.368) 28(4.6,1.368) 29(4.2,-1.368) 30(4.2,1.368) 31(3.8,-1.368) 32(3.8,1.368) 33(3.4,-1.368) 34(3.4,1.368) 35(3,-1.368) 36(3,1.368) 37(2.6,-1.368) 38(2.6,1.368) 39(2.2,-1.368) 40(2.2,1.368) 41(1.8,-1.368) 42(1.8,1.368) 43(1.4,-1.368) 44(1.4,1.368) 45(1,-1.368) 46(1,1.368) 47(0.6,-1.368) 48(0.6,1.368) 49(0.2,-1.368) 50(0.2,1.368) 51(-0.2,-1.368) 52(-0.2,1.368) 53(-0.6,-1.368) 54(-0.6,1.368) 55(-1,-1.368) 56(-1,1.368) 57(-1.4,-1.368) 58(-1.4,1.368) 59(-1.8,-1.368) 60(-1.8,1.368) 61(-2.2,-1.368) 62(-2.2,1.368) 63(-2.6,-1.368) 64(-2.6,1.368) 65(-3,-1.368) 66(-3,1.368) 67(-3.4,-1.368) 68(-3.4,1.368) 69(-3.8,-1.368) 70(-3.8,1.368) 71(-4.2,-1.368) 72(-4.2,1.368) 73(-4.6,-1.368) 74(-4.6,1.368) 75(-5,-1.368) 76(-5,1.368) 77(-5.4,-1.368) 78(-5.4,1.368) 79(-5.8,-1.368) 80(-5.8,1.368) 81(-6.2,-1.368) 82(-6.2,1.368) 83(-6.6,-1.368) 84(-6.6,1.368) 85(-7,-1.368) 86(-7,1.368) 87(-7.4,-1.368) 88(-7.4,1.368) 89(-7.8,-1.368) 90(-7.8,1.368) 91(-8.2,-1.368) 92(-8.2,1.368) 93(-8.6,-1.368) 94(-8.6,1.368) 95(-9,-1.368) 96(-9,1.368) 97(-9.4,-1.368) 98(-9.4,1.368) 99(-9.8,-1.368) 100(-9.8,1.368)
DFN8_1P27_6X5MM_3P1
  rect 1.016x0.61 smd: 1(-2.85,1.905) 2(-2.85,0.635) 3(-2.85,-0.635) 4(-2.85,-1.905) 5(2.85,-1.905) 6(2.85,-0.635) 7(2.85,0.635) 8(2.85,1.905)
  rect 3.099x3.099 smd: 9(0,0)
FBGA153_0P5_11P5X13
  round 0.254 smd: A1(-3.25,3.25) A2(-2.75,3.25) A3(-2.25,3.25) A4(-1.75,3.25) A5(-1.25,3.25) A6(-0.75,3.25) A7(-0.25,3.25) A8(0.25,3.25) A9(0.75,3.25) A10(1.25,3.25) A11(1.75,3.25) A12(2.25,3.25) A13(2.75,3.25) A14(3.25,3.25) B1(-3.25,2.75) B2(-2.75,2.75) B3(-2.25,2.75) B4(-1.75,2.75) B5(-1.25,2.75) B6(-0.75,2.75) B7(-0.25,2.75) B8(0.25,2.75) B9(0.75,2.75) B10(1.25,2.75) B11(1.75,2.75) B12(2.25,2.75) B13(2.75,2.75) B14(3.25,2.75) C1(-3.25,2.25) C2(-2.75,2.25) C3(-2.25,2.25) C4(-1.75,2.25) C5(-1.25,2.25) C6(-0.75,2.25) C7(-0.25,2.25) C8(0.25,2.25) C9(0.75,2.25) C10(1.25,2.25) C11(1.75,2.25) C12(2.25,2.25) C13(2.75,2.25) C14(3.25,2.25) D1(-3.25,1.75) D2(-2.75,1.75) D3(-2.25,1.75) D4(-1.75,1.75) D12(2.25,1.75) D13(2.75,1.75) D14(3.25,1.75) E1(-3.25,1.25) E2(-2.75,1.25) E3(-2.25,1.25) E5(-1.25,1.25) E6(-0.75,1.25) E7(-0.25,1.25) E8(0.25,1.25) E9(0.75,1.25) E10(1.25,1.25) E12(2.25,1.25) E13(2.75,1.25) E14(3.25,1.25) F1(-3.25,0.75) F2(-2.75,0.75) F3(-2.25,0.75) F5(-1.25,0.75) F10(1.25,0.75) F12(2.25,0.75) F13(2.75,0.75) F14(3.25,0.75) G1(-3.25,0.25) G2(-2.75,0.25) G3(-2.25,0.25) G5(-1.25,0.25) G10(1.25,0.25) G12(2.25,0.25) G13(2.75,0.25) G14(3.25,0.25) H1(-3.25,-0.25) H2(-2.75,-0.25) H3(-2.25,-0.25) H5(-1.25,-0.25) H10(1.25,-0.25) H12(2.25,-0.25) H13(2.75,-0.25) H14(3.25,-0.25) J1(-3.25,-0.75) J2(-2.75,-0.75) J3(-2.25,-0.75) J5(-1.25,-0.75) J10(1.25,-0.75) J12(2.25,-0.75) J13(2.75,-0.75) J14(3.25,-0.75) K1(-3.25,-1.25) K2(-2.75,-1.25) K3(-2.25,-1.25) K5(-1.25,-1.25) K6(-0.75,-1.25) K7(-0.25,-1.25) K8(0.25,-1.25) K9(0.75,-1.25) K10(1.25,-1.25) K12(2.25,-1.25) K13(2.75,-1.25) K14(3.25,-1.25) L1(-3.25,-1.75) L2(-2.75,-1.75) L3(-2.25,-1.75) L12(2.25,-1.75) L13(2.75,-1.75) L14(3.25,-1.75) M1(-3.25,-2.25) M2(-2.75,-2.25) M3(-2.25,-2.25) M4(-1.75,-2.25) M5(-1.25,-2.25) M6(-0.75,-2.25) M7(-0.25,-2.25) M8(0.25,-2.25) M9(0.75,-2.25) M10(1.25,-2.25) M11(1.75,-2.25) M12(2.25,-2.25) M13(2.75,-2.25) M14(3.25,-2.25) N1(-3.25,-2.75) N2(-2.75,-2.75) N3(-2.25,-2.75) N4(-1.75,-2.75) N5(-1.25,-2.75) N6(-0.75,-2.75) N7(-0.25,-2.75) N8(0.25,-2.75) N9(0.75,-2.75) N10(1.25,-2.75) N11(1.75,-2.75) N12(2.25,-2.75) N13(2.75,-2.75) N14(3.25,-2.75) P1(-3.25,-3.25) P2(-2.75,-3.25) P3(-2.25,-3.25) P4(-1.75,-3.25) P5(-1.25,-3.25) P6(-0.75,-3.25) P7(-0.25,-3.25) P8(0.25,-3.25) P9(0.75,-3.25) P10(1.25,-3.25) P11(1.75,-3.25) P12(2.25,-3.25) P13(2.75,-3.25) P14(3.25,-3.25)
GNDPOINT256
  round 5.08 hole 2.769: 1(0,0)
HVQFN56_0P4_7X7_EP4P7MM
  rect 0.889x0.203 smd: 1(-3.45,2.6) 2(-3.45,2.2) 3(-3.45,1.8) 4(-3.45,1.4) 5(-3.45,1) 6(-3.45,0.6) 7(-3.45,0.2) 8(-3.45,-0.2) 9(-3.45,-0.6) 10(-3.45,-1) 11(-3.45,-1.4) 12(-3.45,-1.8) 13(-3.45,-2.2) 14(-3.45,-2.6) 29(3.45,-2.6) 30(3.45,-2.2) 31(3.45,-1.8) 32(3.45,-1.4) 33(3.45,-1) 34(3.45,-0.6) 35(3.45,-0.2) 36(3.45,0.2) 37(3.45,0.6) 38(3.45,1) 39(3.45,1.4) 40(3.45,1.8) 41(3.45,2.2) 42(3.45,2.6)
  rect 0.203x0.889 smd: 15(-2.6,-3.45) 16(-2.2,-3.45) 17(-1.8,-3.45) 18(-1.4,-3.45) 19(-1,-3.45) 20(-0.6,-3.45) 21(-0.2,-3.45) 22(0.2,-3.45) 23(0.6,-3.45) 24(1,-3.45) 25(1.4,-3.45) 26(1.8,-3.45) 27(2.2,-3.45) 28(2.6,-3.45) 43(2.6,3.45) 44(2.2,3.45) 45(1.8,3.45) 46(1.4,3.45) 47(1,3.45) 48(0.6,3.45) 49(0.2,3.45) 50(-0.2,3.45) 51(-0.6,3.45) 52(-1,3.45) 53(-1.4,3.45) 54(-1.8,3.45) 55(-2.2,3.45) 56(-2.6,3.45)
  rect 4.699x4.699 smd: 57(0,0)
IND_2016A
  rect 0.864x1.803 smd: 1(-0.835,0) 2(0.835,0)
IND_SPH2520
  rect 1.219x2.007 smd: 1(-1.01,0) 2(1.01,0)
LED_0603
  rect 0.838x0.787 smd: A(-0.775,0) C(0.775,0)
RC0402_25
  round 0.635 smd: 1(-0.508,0) 2(0.508,0)
SC70_3
  rect 0.711x0.889 smd: 1(-0.648,-0.952) 2(0.648,-0.952) 3(0,0.952)
TESTPOINT_35MIL
  round 0.889 smd: 1(0,0)
TPAD_015
  round 0.381 smd: 1(0,0)
TPAD_020
  round 0.508 smd: 1(0,0)
TPAD_050
  round 1.27 smd: 1(0,0)
unnamed#2
  round 1.016 smd: (0,0)
unnamed#3
  round 1.61 hole 1.61 unplated: (-8.863,8.863) (-8.863,-8.863) (8.863,8.863) (8.863,-8.863)
  round 0.851 hole 0.851 unplated: (-3.783,8.863) (6.323,-8.863)
XTAL2-3P2X1P5-SM
  rect 1.092x1.905 smd: 1(-1.25,0) 2(1.25,0)
XTLOSC4_3P2X2P5MM_SM
  rect 1.397x1.194 smd: 1(-1.1,-0.8) 2(1.1,-0.8) 3(1.1,0.8) 4(-1.1,0.8)

## Nets
GND: BH1.1 BH2.1 BH3.1 C1.2 C2.2 C3.2 C5.2 C6.2 C7.2 C8.2 C10.2 C11.2 C12.2 C13.2 C14.2 C15.2 C16.2 C17.2 C18.2 C19.2 C20.2 C21.2 C22.2 C23.2 C24.2 C25.2 C27.2 C28.2 C29.2 C31.2 C32.2 C33.2 C34.2 C35.2 C36.2 C38.2 C39.2 C40.2 C41.2 C42.2 C43.2 C44.2 C45.2 C47.2 C48.2 C49.2 C50.2 C51.2 C53.2 C55.2 C56.2 C57.2 C58.2 C59.2 C60.2 C61.2 C62.2 C63.2 C64.2 C65.2 C67.2 C68.2 C69.2 C70.2 C71.2 C72.2 C80.2 C81.2 C83.2 C84.2 C85.2 C86.2 C87.2 C88.2 C89.2 C90.2 C91.2 C92.2 C93.2 C94.2 C95.2 C96.2 C97.2 C98.2 C99.2 C100.2 C101.2 C104.2 C105.2 C106.2 C107.2 C108.2 C109.2 C110.2 C111.2 C112.2 C113.2 C114.2 C115.2 C116.2 C117.2 C118.2 C119.2 C120.2 C125.1 C126.2 C127.2 C129.1 C130.2 C131.2 C132.2 C133.1 C135.1 C136.2 C137.2 C138.2 C139.2 C140.1 C141.2 C142.2 C143.1 C144.2 C145.1 C146.2 C147.2 C148.2 C149.1 C150.2 C151.2 C152.1 C153.1 C154.2 C155.2 C156.2 C157.2 C158.1 C159.1 C160.2 C161.2 C164.2 C165.2 C166.1 J3.7 J3.8 J3.14 J3.17 J3.24 J3.27 J3.33 J3.34 J3.39 J3.40 J3.45 J3.46 J3.51 J3.52 J3.57 J3.58 J3.63 J3.69 J3.70 J3.75 J3.76 J3.81 J3.82 J3.87 J3.88 J3.93 J3.94 J3.99 J3.100 J4.1 J4.2 J4.7 J4.8 J4.13 J4.14 J4.19 J4.20 J4.25 J4.26 J4.31 J4.32 J4.37 J4.40 J4.43 J4.49 J4.50 J4.55 J4.60 J4.61 J4.69 J4.70 J4.79 J4.80 J4.84 J4.88 J4.89 J4.92 J4.96 J4.99 J4.100 J5.13 J5.14 J5.15 J5.16 J5.17 J5.18 J5.19 J5.20 J5.21 J5.22 J5.23 J5.24 J5.25 J5.26 J5.27 J5.28 J5.49 J5.50 J5.59 J5.60 J5.69 J5.70 J5.79 J5.80 J5.89 J5.90 J5.99 J5.100 J6.9 J6.10 J6.19 J6.20 J6.29 J6.30 J6.39 J6.40 J6.45 J6.50 J6.51 J6.57 J6.60 J6.63 J6.69 J6.70 J6.75 J6.80 J6.81 J6.89 J6.90 J6.99 J6.100 Q1.2(SOURCE) R1.1 R2.1 R3.1 R4.1 R5.1 R6.1 R24.2 R25.2 R26.2 R27.2 R31.2 R32.2 TP36.1(PIN1) TP37.1(PIN1) TP38.1(PIN1) TP39.1(PIN1) TP48.1(PIN1) TP50.1(TP) U1.A1 U1.A29 U1.AA3 U1.AA7 U1.AA23 U1.AA27 U1.AB8 U1.AB10 U1.AB12 U1.AB14 U1.AB16 U1.AB18 U1.AB20 U1.AB22 U1.AC3 U1.AC6 U1.AC24 U1.AC27 U1.AE3 U1.AE27 U1.AG4 U1.AG6 U1.AG8 U1.AG10 U1.AG12 U1.AG14 U1.AG16 U1.AG18 U1.AG20 U1.AG22 U1.AG24 U1.AG26 U1.AJ1 U1.AJ29 U1.C4 U1.C6 U1.C8 U1.C10 U1.C12 U1.C14 U1.C16 U1.C18 U1.C20 U1.C22 U1.C24 U1.C26 U1.E3 U1.E27 U1.G3 U1.G6 U1.G24 U1.G27 U1.H8 U1.H10 U1.H12 U1.H14 U1.H16 U1.H18 U1.H20 U1.H22 U1.J3 U1.J7 U1.J23 U1.J27 U1.L3 U1.L7 U1.L14 U1.L16 U1.L23 U1.L27 U1.M11 U1.M19 U1.N3 U1.N7(VSS99) U1.N11 U1.N19 U1.N23 U1.N27 U1.P11 U1.P19 U1.R3 U1.R7 U1.R11 U1.R12 U1.R13 U1.R14 U1.R16 U1.R17 U1.R18 U1.R19 U1.R23 U1.R27 U1.T11 U1.T19 U1.U3 U1.U7 U1.U11 U1.U18 U1.U19 U1.U23 U1.U27 U1.V11 U1.V19 U1.W3 U1.W7 U1.W14 U1.W16 U1.W23 U1.W27 U2.A3 U2.A10 U2.AB3 U2.AB5 U2.AB8 U2.AB10 U2.C1 U2.C5 U2.C8 U2.C12 U2.D2 U2.D4 U2.D9 U2.D11 U2.E1 U2.E5 U2.E8 U2.E12 U2.G1 U2.G3 U2.G5 U2.G8 U2.G10 U2.G12 U2.J1 U2.J3 U2.J10 U2.J12 U2.K2 U2.K4 U2.K9 U2.K11 U2.N2 U2.N4 U2.N9 U2.N11 U2.P1 U2.P3 U2.P10 U2.P12 U2.T1 U2.T3 U2.T5 U2.T8 U2.T10 U2.T12 U2.V1 U2.V5 U2.V8 U2.V12 U2.W2 U2.W4 U2.W9 U2.W11 U2.Y1 U2.Y5 U2.Y8(VSS_Y8) U2.Y12 U3.A6 U3.C4 U3.E7 U3.G5 U3.H10 U3.J5 U3.K8 U3.N2 U3.N5 U3.P4 U3.P6 U4.4 U4.9 U6.5 U6.30 U6.43 U6.57 Y1.2 Y1.4
VDD_1V8: C1.1 C2.1 C3.1 C5.1 C6.1 C7.1 C8.1 C18.1 C27.1 C80.1 C81.1 C83.1 C84.1 C85.1 C86.1 C113.1 C114.1 C115.1 C116.1 C119.1 C120.1 C146.1 C147.1 C161.1 J5.29 J5.31 J5.33 J5.35 J5.37 J5.39 L8.2 R13.1 R14.1 R15.1 R16.1 R17.1 R18.1 R36.1 R37.1 R38.1 R61.1 TP33.1(TP) U1.AA11 U1.AA14 U1.AA16 U1.AA19 U1.AA24 U1.J11 U1.J16 U1.K11 U1.R22 U1.U22 U1.U24 U1.Y10 U1.Y11 U2.F1 U2.F12 U2.G4 U2.G9 U2.T4 U2.T9 U2.U1 U2.U12 U3.C6 U3.M4 U3.N4 U3.P3 U3.P5 U4.8 U6.14
VDD_3V3: C20.1 C110.1 C111.1 C112.1 C141.1 C142.1 C152.2 C160.1 J5.30 J5.32 J5.34 J5.36 J5.38 J5.40 L7.2 R12.1 TP31.1(TP) U1.J14 U3.E6 U3.F5 U3.J10 U3.K9 U6.21 U6.22
VDD_ARM: C13.1 C14.1 C15.1 C16.1 C17.1 C21.1 C22.1 C23.1 C24.1 C25.1 C126.1 C127.1 L4.2 R50.1 R51.2 TP25.1(TP) U1.T14 U1.T16 U1.U12 U1.U13 U1.U14 U1.U15 U1.U16 U1.U17 U1.V14 U1.V16 U1.W12 U1.W13 U1.W17 U1.Y14 U1.Y15 U1.Y16
VDD_MIPI_1V2_CAP: C72.1 U1.F20
VDD_SNVS_0V8: C11.1 U1.N26
VDD_SOC: C28.1 C29.1 C31.1 C32.1 C33.1 C34.1 C35.1 C36.1 C43.1 C44.1 C45.1 C47.1 C53.1 C55.1 C56.1 C57.1 C58.1 C59.1 C60.1 C61.1 C130.1 C131.1 C136.1 C137.1 L5.2 L6.2 R52.1 R53.2 TP27.1(TP) TP49.1(PIN1) U1.K10 U1.K14 U1.K15 U1.K16 U1.L9 U1.L10 U1.L11 U1.L12 U1.L13 U1.L17 U1.L18 U1.L19 U1.L20 U1.L21 U1.M14 U1.M16 U1.N9 U1.N10 U1.N12 U1.N13 U1.N14 U1.N15 U1.N16 U1.N17 U1.N18 U1.N20 U1.N21 U1.P14 U1.P16 U1.R9 U1.R10 U1.R20 U1.R21 U1.U9 U1.U10 U1.U20 U1.U21 U1.W9 U1.W10 U1.W11 U1.W20 U1.W21 U1.W22
VDDA_1V8: C12.1 C38.1 C39.1 C40.1 C41.1 C42.1 C48.1 C49.1 C50.1 C51.1 C139.1 TP30.1(TP) U1.AA20 U1.AA22 U1.J19 U1.J20 U1.J22 U1.K19 U1.K20 U1.L22 U1.N22 U1.R6 U1.W18 U1.W19 U1.Y19 U1.Y20 U6.54
VINT: C155.1 U6.4
BOOT_MODE0: J3.9 TP51.1(TP) U1.G10
BOOT_MODE1: J3.11 TP52.1(TP) U1.F8
BOOT_MODE2: J3.13 U1.G8
BOOT_MODE3: J3.15 U1.G12
CLKIN1: J4.86 TP13.1(PIN1) U1.K28
CLKIN2: J4.94 TP14.1(PIN1) U1.L28
CLKOUT1: J4.90 TP46.1(PIN1) U1.K29
CLKOUT2: J4.98 TP45.1(PIN1) U1.L29
CSI1_CKN: J3.84 U1.E22
CSI1_CKP: J3.86 U1.D22
CSI1_DN0: J3.72 U1.E18
CSI1_DN1: J3.78 U1.E20
CSI1_DN2: J3.90 U1.E24
CSI1_DN3: J3.96 U1.E26
CSI1_DP0: J3.74 U1.D18
CSI1_DP1: J3.80 U1.D20
CSI1_DP2: J3.92 U1.D24
CSI1_DP3: J3.98 U1.D26
CSI2_CKN: J4.16 U1.B23
CSI2_CKP: J4.18 U1.A23
CSI2_DN0: J4.28 U1.B25
CSI2_DN1: J4.22 U1.B24
CSI2_DN2: J4.10 U1.B22
CSI2_DN3: J4.4 U1.B21
CSI2_DP0: J4.30 U1.A25
CSI2_DP1: J4.24 U1.A24
CSI2_DP2: J4.12 U1.A22
CSI2_DP3: J4.6 U1.A21
DRAM_CA0_A: U1.L6 U2.R2
DRAM_CA0_B: U1.W4 U2.H2
DRAM_CA1_A: U1.L4 U2.P2
DRAM_CA1_B: U1.W5 U2.J2
DRAM_CA2_A: U1.E4 U2.R9
DRAM_CA2_B: U1.AE4 U2.H9
DRAM_CA3_A: U1.D4 U2.R10
DRAM_CA3_B: U1.AF4 U2.H10
DRAM_CA4_A: U1.N4 U2.R11
DRAM_CA4_B: U1.U5 U2.H11
DRAM_CA5_A: U1.N5 U2.P11
DRAM_CA5_B: U1.U6 U2.J11
DRAM_CK_C_A: R9.2 U1.M2 U2.P9
DRAM_CK_C_B: R10.2 U1.V1 U2.J9
DRAM_CK_T_A: R9.1 U1.M1 U2.P8
DRAM_CK_T_B: R10.1 U1.V2 U2.J8
DRAM_CKE0_A: R3.2 U1.J6 U2.P4
DRAM_CKE0_B: R1.2 U1.AA4 U2.J4
DRAM_CKE1_A: R4.2 U1.G5 U2.P5
DRAM_CKE1_B: R2.2 U1.AA5 U2.J5
DRAM_DATA0_A: U1.B3 U2.AA11
DRAM_DATA0_B: U1.AC1 U2.B2
DRAM_DATA1_A: U1.A2 U2.Y11
DRAM_DATA1_B: U1.AB1 U2.C2
DRAM_DATA2_A: U1.E1 U2.V11
DRAM_DATA2_B: U1.W2 U2.F2
DRAM_DATA3_A: U1.F2 U2.U11
DRAM_DATA3_B: U1.Y2 U2.E2
DRAM_DATA4_A: U1.E2 U2.U9
DRAM_DATA4_B: U1.Y1 U2.E4
DRAM_DATA5_A: U1.C1 U2.V9
DRAM_DATA5_B: U1.W1 U2.F4
DRAM_DATA6_A: U1.C2 U2.Y9
DRAM_DATA6_B: U1.AC2 U2.B4
DRAM_DATA7_A: U1.B1 U2.AA9
DRAM_DATA7_B: TP23.1(PIN1) U1.AD1 U2.C4
DRAM_DATA8_A: U1.G1 U2.AA2
DRAM_DATA8_B: U1.AH3 U2.B11
DRAM_DATA9_A: U1.H1 U2.Y2
DRAM_DATA9_B: U1.AJ2 U2.C11
DRAM_DATA10_A: U1.K1 U2.V4
DRAM_DATA10_B: U1.AE1 U2.E11
DRAM_DATA11_A: U1.K2 U2.V2
DRAM_DATA11_B: U1.AD2 U2.F11
DRAM_DATA12_A: U1.L2 U2.U2
DRAM_DATA12_B: U1.AE2 U2.F9
DRAM_DATA13_A: U1.L1 U2.U4
DRAM_DATA13_B: U1.AG1 U2.E9
DRAM_DATA14_A: U1.G2 U2.AA4
DRAM_DATA14_B: U1.AG2 U2.C9
DRAM_DATA15_A: TP24.1(PIN1) U1.F1 U2.Y4
DRAM_DATA15_B: U1.AH1 U2.B9
DRAM_DMI0_A: U1.B2 U2.Y10
DRAM_DMI0_B: U1.AB2 U2.C3
DRAM_DMI1_A: U1.H2 U2.Y3
DRAM_DMI1_B: U1.AH2 U2.C10
DRAM_NCS0_A: U1.N6 U2.R4
DRAM_NCS0_B: U1.U4 U2.H4
DRAM_NCS1_A: U1.J4 U2.R3
DRAM_NCS1_B: U1.AA6 U2.H3
DRAM_NRESET: R5.2 U1.T1 U2.T11
DRAM_SDQS0_C_A: U1.D1 U2.V10
DRAM_SDQS0_C_B: U1.AA1 U2.E3
DRAM_SDQS0_T_A: U1.D2 U2.W10
DRAM_SDQS0_T_B: U1.AA2 U2.D3
DRAM_SDQS1_C_A: U1.J1 U2.V3
DRAM_SDQS1_C_B: U1.AF1 U2.E10
DRAM_SDQS1_T_A: U1.J2 U2.W3
DRAM_SDQS1_T_B: U1.AF2 U2.D10
DRAM_VREF: TP1.1(PIN1) U1.R2
DRAM_ZQ0: R7.2 U2.A5
DRAM_ZQ1: R8.2 U2.A8
DSI_CKN: J3.83 U1.B18
DSI_CKP: J3.85 U1.A18
DSI_DN0: J3.71 U1.B16
DSI_DN1: J3.77 U1.B17
DSI_DN2: J3.89 U1.B19
DSI_DN3: J3.95 U1.B20
DSI_DP0: J3.73 U1.A16
DSI_DP1: J3.79 U1.A17
DSI_DP2: J3.91 U1.A19
DSI_DP3: J3.97 U1.A20
EARC_AUX: TP44.1(PIN1) U1.AH23
EARC_N_HPD: J6.53 U1.AH22
EARC_P_UTIL: J6.55 U1.AJ23
ECSPI2_MISO: J6.37 U1.AH20
ECSPI2_MOSI: J6.35 U1.AJ21
ECSPI2_SCLK: J6.31 U1.AH21
ECSPI2_SS0: J6.33 U1.AJ22
EMMC_VDDIM: C117.1 C118.1 U3.C2
ENET_MDC: J6.52 U1.AH28
ENET_MDIO: J6.54 U1.AH29
ENET_RD0: J6.82 U1.AG29
ENET_RD1: J6.84 U1.AG28
ENET_RD2: J6.86 U1.AF29
ENET_RD3: J6.88 U1.AF28
ENET_RX_CTL: J6.72 U1.AE28
ENET_RXC: J6.74 U1.AE29
ENET_TD0: J6.62 U1.AC25
ENET_TD1: J6.64 U1.AE26
ENET_TD2: J6.66 U1.AF26
ENET_TD3: J6.68 U1.AD24
ENET_TX_CTL: J6.56 U1.AF24
ENET_TXC: J6.58 U1.AE24
GPIO1_IO00: J3.25 TP26.1(PIN1) U1.A7
GPIO1_IO01: J3.23 U1.E8
GPIO1_IO05: J3.21 U1.B4
GPIO1_IO06: J3.19 U1.A3
GPIO1_IO07: J3.32 U1.F6
GPIO1_IO08: J3.30 U1.A8
GPIO1_IO09: J3.28 U1.B8
GPIO1_IO10: J3.26 U1.B7
GPIO1_IO11: J3.22 U1.D8
GPIO1_IO12: J3.20 U1.A5
GPIO1_IO13: J3.18 U1.A6
GPIO1_IO14: J3.16 U1.A4
GPIO1_IO15: J3.12 U1.B5
HDMI_CEC: J6.49 U1.AD22
HDMI_DDC_SCL: J6.41 U1.AC22
HDMI_DDC_SDA: J6.43 U1.AF22
HDMI_HPD: J6.47 U1.AE22
HDMI_TXCN: J6.59 U1.AJ24
HDMI_TXCP: J6.61 U1.AH24
HDMI_TXN0: J6.65 U1.AJ25
HDMI_TXN1: J6.71 U1.AJ26
HDMI_TXN2: J6.77 U1.AJ27
HDMI_TXP0: J6.67 U1.AH25
HDMI_TXP1: J6.73 U1.AH26
HDMI_TXP2: J6.79 U1.AH27
I2C1_SCL: R13.2 R62.1 U1.AC8
I2C1_SDA: R14.2 R64.1 U1.AH7
I2C2_SCL: J5.55 R15.2 U1.AH6
I2C2_SDA: J5.57 R16.2 U1.AE8
I2C3_SCL: J5.61 R17.2 U1.AJ7
I2C3_SDA: J5.63 R18.2 U1.AJ6
I2C4_SCL: J5.65 U1.AF8
I2C4_SDA: J5.67 U1.AD8
JTAG_MOD: J3.66 R32.1 TP22.1(PIN1) U1.G20
JTAG_TCK: J3.68 R31.1 TP5.1(PIN1) U1.G18
JTAG_TDI: J3.64 TP3.1(PIN1) U1.G16
JTAG_TDO: J3.62 TP6.1(PIN1) U1.F14
JTAG_TMS: J3.60 TP4.1(PIN1) U1.G14
LVDS0_CLK_N: J4.47 U1.G28
LVDS0_CLK_P: J4.45 U1.F29
LVDS0_TX0_N: J4.35 U1.E28
LVDS0_TX0_P: J4.33 U1.D29
LVDS0_TX1_N: J4.41 U1.F28
LVDS0_TX1_P: J4.39 U1.E29
LVDS0_TX2_N: J4.53 U1.H28
LVDS0_TX2_P: J4.51 U1.G29
LVDS0_TX3_N: J4.59 U1.J28
LVDS0_TX3_P: J4.57 U1.H29
LVDS1_CLK_N: J4.17 U1.B28
LVDS1_CLK_P: J4.15 U1.A28
LVDS1_TX0_N: J4.5 U1.B26
LVDS1_TX0_P: J4.3 U1.A26
LVDS1_TX1_N: J4.11 U1.B27
LVDS1_TX1_P: J4.9 U1.A27
LVDS1_TX2_N: J4.23 U1.C28
LVDS1_TX2_P: J4.21 U1.B29
LVDS1_TX3_N: J4.29 U1.D28
LVDS1_TX3_P: J4.27 U1.C29
NAND_DQS: J4.72 R11.2
NVCC_DRAM_1V1: C62.1 C63.1 C64.1 C65.1 C67.1 C68.1 C69.1 C70.1 C71.1 C87.1 C88.1 C89.1 C90.1 C91.1 C92.1 C93.1 C94.1 C95.1 C96.1 C97.1 C98.1 C99.1 C100.1 C101.1 C104.1 C150.1 C151.1 L9.2 R7.1 R8.1 TP35.1(TP) U1.AA8 U1.AA10 U1.J8 U1.J10 U1.L8 U1.N8 U1.R8 U1.U8 U1.W8 U2.A4 U2.A9 U2.AA3 U2.AA5 U2.AA8 U2.AA10 U2.AB4 U2.AB9 U2.B3 U2.B5 U2.B8 U2.B10 U2.D1 U2.D5 U2.D8 U2.D12 U2.F3 U2.F5 U2.F8 U2.F10 U2.G2 U2.H1 U2.H5 U2.H8 U2.H12 U2.K1 U2.K3 U2.K10 U2.K12 U2.N1 U2.N3 U2.N10 U2.N12 U2.R1 U2.R5 U2.R8 U2.R12 U2.T2 U2.U3 U2.U5 U2.U8 U2.U10 U2.W1 U2.W5 U2.W8 U2.W12 U6.52
NVCC_SD2: C19.1 C148.1 R21.1 R22.1 R23.1 TP34.1(TP) U1.W24 U6.55
NVCC_SNVS_1V8: C10.1 C132.1 R28.1 R29.1 R30.1 R55.1 TP28.1(TP) U1.R24 U6.3
ONOFF: J4.74 R30.2 TP7.1(TP) U1.G22
PCIE_CLKN: J3.53 U1.E16
PCIE_CLKP: J3.55 U1.D16
PCIE_RESREF: R24.1 U1.F16
PCIE_RXN: J3.59 U1.B14
PCIE_RXP: J3.61 U1.A14
PCIE_TXN: J3.65 U1.B15
PCIE_TXP: J3.67 U1.A15
PMIC_32K_OUT: J5.41 R75.2
PMIC_NINT: U1.D6 U6.13
PMIC_ON_REQ: J4.78 R28.2 R57.1 TP9.1(TP) U1.F22
PMIC_SCLH: J5.51 U6.25
PMIC_SCLL: J5.45 U6.27
PMIC_SDAH: J5.53 U6.24
PMIC_SDAL: J5.47 U6.26
PMIC_STBY_REQ: R58.1 TP10.1(TP) U1.J24
POR_B: J4.76 R29.2 R63.2 TP8.1(TP) U1.J29
QSPIA_DATA0: TP20.1(TP) U1.R25 U4.5
QSPIA_DATA1: U1.L25 U4.2
QSPIA_DATA2: U1.L24 U4.3(W\/DQ2)
QSPIA_DATA3: U1.N24 U4.7
QSPIA_DQS: C105.1 R11.1 U1.R26
QSPIA_NSS0: R38.2 U1.L26 U4.1
QSPIA_SCLK: TP21.1(TP) U1.N25 U4.6
SAI1_MCLK: J5.97 U1.AE12
SAI1_RXC: J5.78 U1.AH8
SAI1_RXD0: J5.82 U1.AC10
SAI1_RXD1: J5.84 U1.AF10
SAI1_RXD2: J5.86 U1.AH9
SAI1_RXD3: J5.88 U1.AJ8
SAI1_RXD4: J5.92 U1.AD10
SAI1_RXD5: J5.94 U1.AE10
SAI1_RXD6: J5.96 U1.AH10
SAI1_RXD7: J5.98 U1.AH12
SAI1_RXFS: J5.76 U1.AJ9
SAI1_TXC: J5.73 U1.AJ12
SAI1_TXD0: J5.75 U1.AJ11
SAI1_TXD1: J5.77 U1.AJ10
SAI1_TXD2: J5.81 U1.AH11
SAI1_TXD3: J5.83 U1.AD12
SAI1_TXD4: J5.85 U1.AH13
SAI1_TXD5: J5.87 U1.AH14
SAI1_TXD6: J5.91 U1.AC12
SAI1_TXD7: J5.93 U1.AJ13
SAI1_TXFS: J5.95 U1.AF12
SAI2_MCLK: J6.18 U1.AJ15
SAI2_RXC: J6.14 U1.AJ16
SAI2_RXD: J6.17 U1.AJ14
SAI2_RXFS: J6.12 U1.AH17
SAI2_TXC: J6.11 U1.AH15
SAI2_TXD: J6.15 U1.AH16
SAI2_TXFS: J6.13 U1.AJ17
SAI3_MCLK: J6.22 U1.AJ20
SAI3_RXC: J6.24 U1.AJ18
SAI3_RXD: J6.28 U1.AF18
SAI3_RXFS: J6.26 U1.AJ19
SAI3_TXC: J6.21 U1.AH19
SAI3_TXD: J6.25 U1.AH18
SAI3_TXFS: J6.23 U1.AC16
SAI5_MCLK: J6.8 U1.AF14
SAI5_RXC: J6.4 U1.AD14
SAI5_RXD0: J6.1 U1.AE16
SAI5_RXD1: J6.3 U1.AD16
SAI5_RXD2: J6.5 U1.AF16
SAI5_RXD3: J6.7 U1.AE14
SAI5_RXFS: J6.2 U1.AC14
SD1_CLK: J4.75 U1.W28
SD1_CMD: J4.77 U1.W29
SD1_DATA0: J4.81 U1.Y29
SD1_DATA1: J4.83 U1.Y28
SD1_DATA2: J4.85 U1.V29
SD1_DATA3: J4.87 U1.V28
SD1_DATA4: J4.91 U1.U26
SD1_DATA5: J4.93 U1.AA29
SD1_DATA6: J4.95 U1.AA28
SD1_DATA7: J4.97 U1.U25
SD1_RESET_B: J4.73 U1.W25
SD1_STROBE: J4.71 U1.W26
SD2_CLK: J6.96 U1.AB29
SD2_CMD: J6.98 R22.2 U1.AB28
SD2_DATA0: J6.91 R21.2 U1.AC28
SD2_DATA1: J6.93 U1.AC29
SD2_DATA2: J6.95 U1.AA26
SD2_DATA3: J6.97 U1.AA25
SD2_NCD: J6.94 U1.AD29
SD2_RESET_B: J6.87 R23.2 R54.1 U1.AD28
SD2_VSEL: U1.E6 U6.29
SD2_WP: J6.92 U1.AC26
SD3_CLK: TP18.1(PIN1) U1.U28 U3.M6
SD3_CMD: R37.2 TP17.1(PIN1) U1.U29 U3.M5
SD3_DATA0: R36.2 TP15.1(PIN1) U1.P29 U3.A3
SD3_DATA1: U1.N29 U3.A4
SD3_DATA2: U1.M29 U3.A5
SD3_DATA3: U1.R29 U3.B2
SD3_DATA4: U1.R28 U3.B3
SD3_DATA5: U1.P28 U3.B4
SD3_DATA6: U1.N28 U3.B5
SD3_DATA7: U1.M28 U3.B6
SD3_STROBE: TP16.1(PIN1) U1.T29 U3.H5
SPDIF_EXT_CLK: J6.36 U1.AC18
SPDIF_RX: J6.34 U1.AD18
SPDIF_TX: J6.32 U1.AE18
SYS_NRST: J5.43 R56.1 TP40.1(TP)
SYS_STATUS: Q1.1 U1.T28
UART1_CTS: J5.56 U1.AE6
UART1_RTS: J5.58 U1.AJ4
UART1_RXD: J5.54 U1.AD6
UART1_TXD: J5.52 U1.AJ3
UART2_RXD: J5.64 TP54.1(TP) U1.AF6
UART2_TXD: J5.62 TP53.1(TP) U1.AH4
UART3_CTS: J6.42 U1.AD20
UART3_RTS: J6.44 U1.AE20
UART3_RXD: J6.48 U1.AF20
UART3_TXD: J6.46 U1.AC20
UART4_RXD: J5.68 TP56.1(TP) U1.AJ5
UART4_TXD: J5.66 TP55.1(TP) U1.AH5
USB1_DN: J3.36 TP58.1(TP) U1.E10
USB1_DP: J3.38 TP59.1(TP) U1.D10
USB1_ID: J3.42 U1.B11
USB1_RXN: J3.29 U1.B9
USB1_RXP: J3.31 U1.A9
USB1_TXN: J3.35 U1.B10
USB1_TXP: J3.37 U1.A10
USB1_VBUS_3V3: J3.44 TP57.1(TP) U1.A11
USB2_DN: J3.54 U1.E14
USB2_DP: J3.56 U1.D14
USB2_ID: J3.48 U1.E12
USB2_RXN: J3.41 U1.B12
USB2_RXP: J3.43 U1.A12
USB2_TXN: J3.47 U1.B13
USB2_TXP: J3.49 U1.A13
USB2_VBUS_3V3: J3.50 U1.D12
VSD_3V3: C153.2 C166.2 J5.42 J5.44 J5.46 U6.23
VSYS_5V: C125.2 C129.2 C133.2 C135.2 C140.2 C143.2 C145.2 C149.2 C154.1 C158.2 C159.2 J5.1 J5.2 J5.3 J5.4 J5.5 J5.6 J5.7 J5.8 J5.9 J5.10 J5.11 J5.12 TP43.1(TP) TP47.1(PIN1) U6.16 U6.17 U6.18 U6.33 U6.34 U6.35 U6.47 U6.48 U6.49 U6.53 U6.56
WDOG_B: J3.10 R60.1 TP41.1(TP) U1.B6
XIN_32K: C156.1 QZ1.2 R65.1 U6.10
XOUT_32K: C157.1 QZ1.1 R65.2 U6.11(XTAL_OUT)
XTALI_24M: C108.1 R35.1 TP12.1(PIN1) U1.G25 Y1.3
XTALI_32K: C164.1 QZ2.2 R74.1 TP11.1(PIN1) U1.J25
XTALO_24M: C109.1 R35.2 U1.G26 Y1.1
XTALO_32K: C165.1 QZ2.1 R74.2 U1.J26
N106651228: L4.1 U6.45 U6.46
N106658448: L5.1 U6.36 U6.37
N106658526: R52.2 R53.1 U6.38
N106658680: R50.2 R51.1 U6.44
N106678828: L9.1 U6.50 U6.51
N106678929: L7.1 U6.19 U6.20
N106679105: L6.1 U6.31 U6.32
N106679133: L8.1 U6.15
N107222690: TP19.1(PIN1) U3.K5
N107591800: C138.1 TP29.1(PIN1) U6.2
N108072637: D1.C(CATHODE) Q1.3
N108986859: R62.2 U6.41
N108986878: R64.2 U6.42
N108987071: R57.2 U6.39
N108987090: R58.2 U6.40
N108987195: R60.2 R61.2 U6.28
N108987391: R55.2 R56.2 U6.8
N108988596: R63.1 U6.9
N109012947: C144.1 TP32.1(PIN1) U6.1
N109024867: R54.2 U6.12
N109218202: R25.1 U1.F10
N109218405: R26.1 U1.F12
N109220114: C106.1 U1.F24
N109220146: C107.1 U1.F18
N109264586: R6.2 U1.R1
N109264594: TP2.1(PIN1) U1.P2
N109658046: R27.1 U1.AJ28
N109837143: R75.1 U6.7
N110108823: D1.A R12.2

Pads without a net: J3 1 2 3 4 5 6; J4 34 36 38 42 44 46 48 52 54 56 58 62 63 64 65 66 67 68 82; J5 48 71 72 74; J6 6 16 27 38 76 78 83 85; U1 AC4 AC5 G4 J5 L5 N1 N2 P1 R4 R5 T2 U1 U2 W6; U2 A1 A2 A11 A12 AA1 AA12 AB1 AB2 AB11 AB12 B1 B12 G11 K5 K8 N5 N8; U3 A1 A2 A7 A8 A9 A10 A11 A12 A13 A14 B1 B7 B8 B9 B10 B11 B12 B13 B14 C1 C3 C5 C7 C8 C9 C10 C11 C12 C13 C14 D1 D2 D3 D4 D12 D13 D14 E1 E2 E3 E5 E8 E9 E10 E12 E13 E14 F1 F2 F3 F10 F12 F13 F14 G1 G2 G3 G10 G12 G13 G14 H1 H2 H3 H12 H13 H14 J1 J2 J3 J12 J13 J14 K1 K2 K3 K6 K7 K10 K12 K13 K14 L1 L2 L3 L12 L13 L14 M1 M2 M3 M7 M8 M9 M10 M11 M12 M13 M14 N1 N3 N6 N7 N8 N9 N10 N11 N12 N13 N14 P1 P2 P7 P8 P9 P10 P11 P12 P13 P14; U6 6

## Via types
v1: diameter 0.406, hole 0.203, TOP to BOTTOM, 1430 vias
v2: diameter 0.508, hole 0.254, TOP to BOTTOM, 64 vias
